# Altium PCB TDR3.PcbDoc
Units mm, origin at the board's own origin, x right, y up, seen from the top; angles counter-clockwise.
Board outline 49.02 x 57.02 mm, 6 copper layers (Top Layer, Int1 (GND), Int2 (GND), Int3 (PWR), Int4 (GND), Bottom Layer), stack 1.554 mm thick; 88 components, 47 nets, 274 pads, 188 vias.
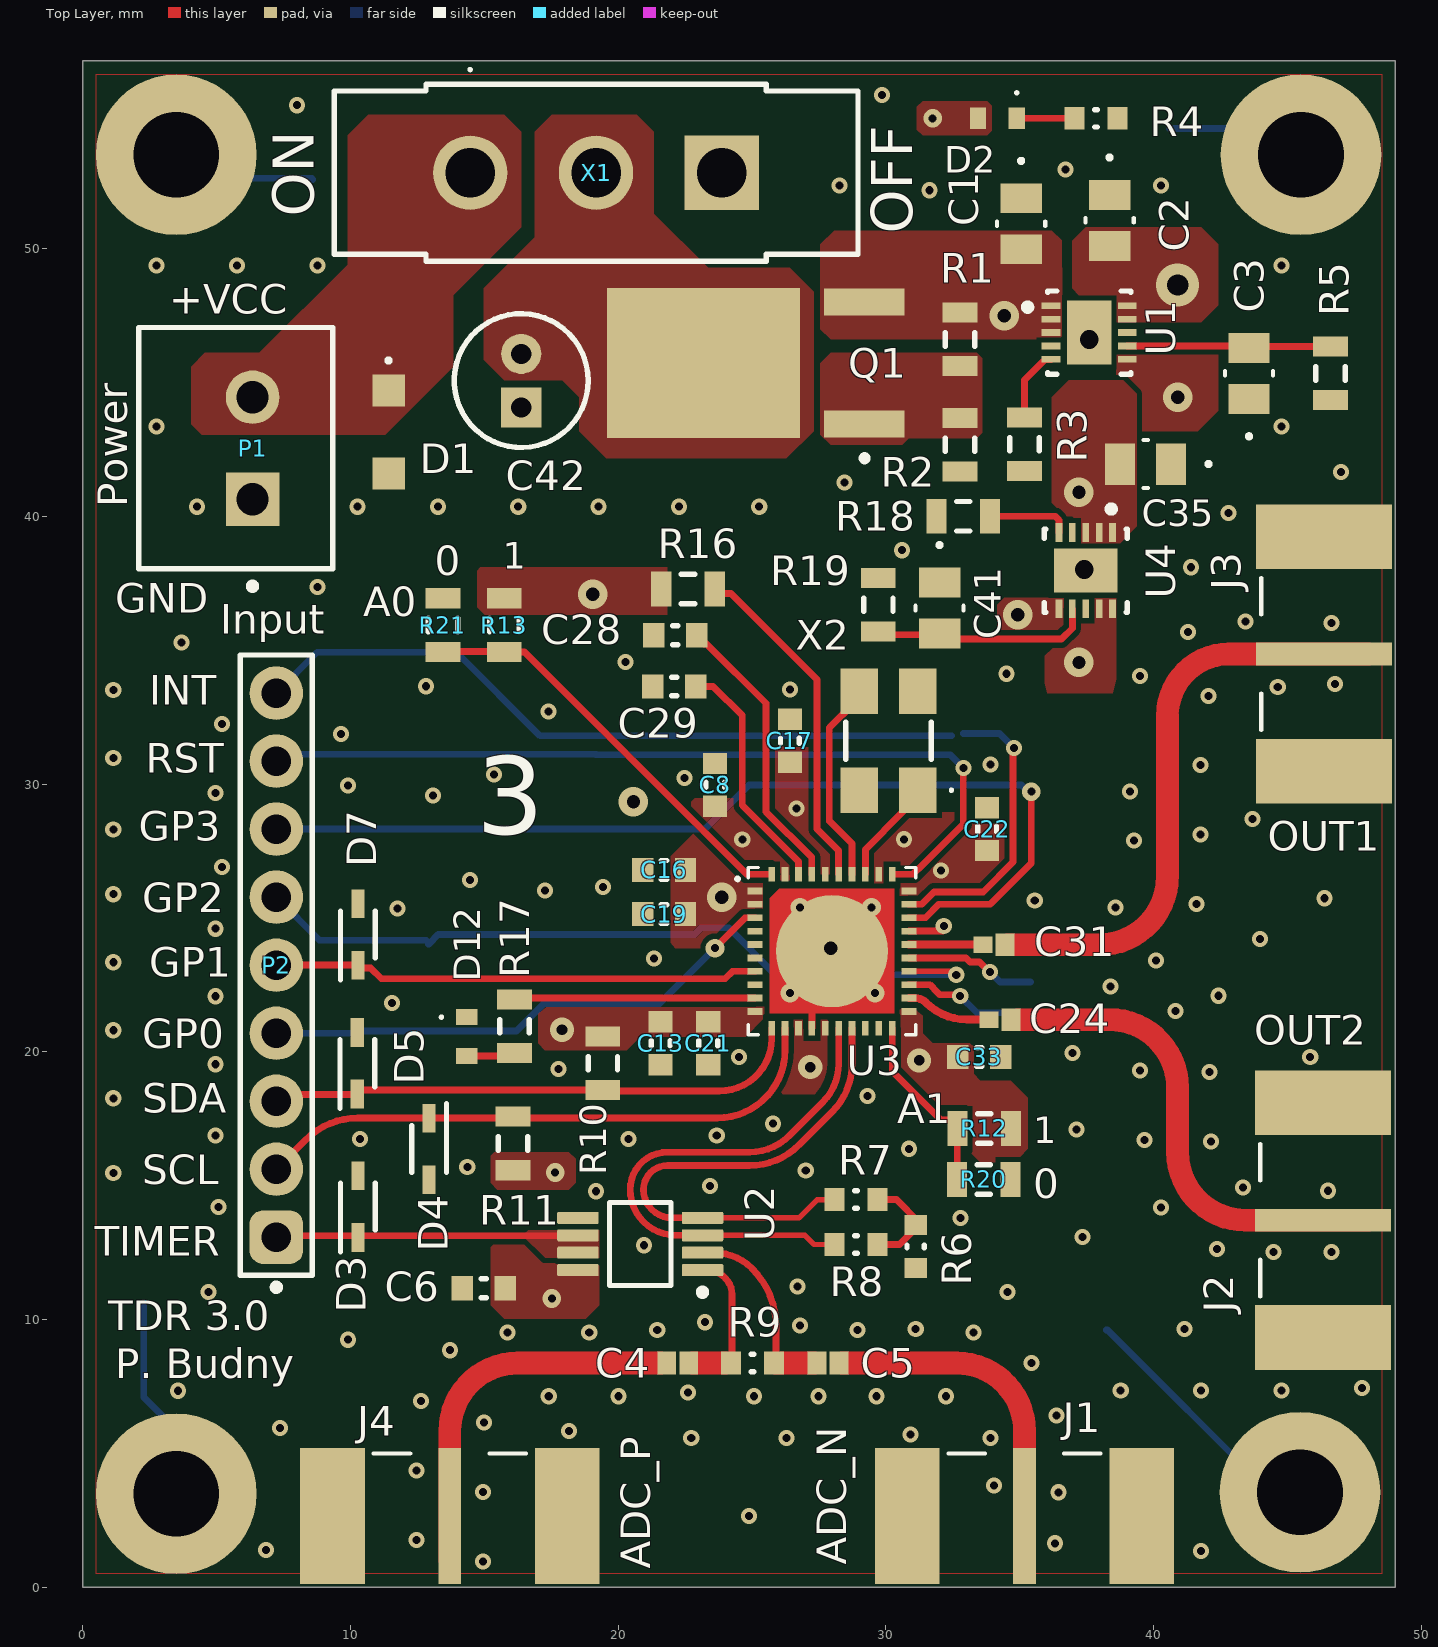
[diagram p0: Top Layer view]
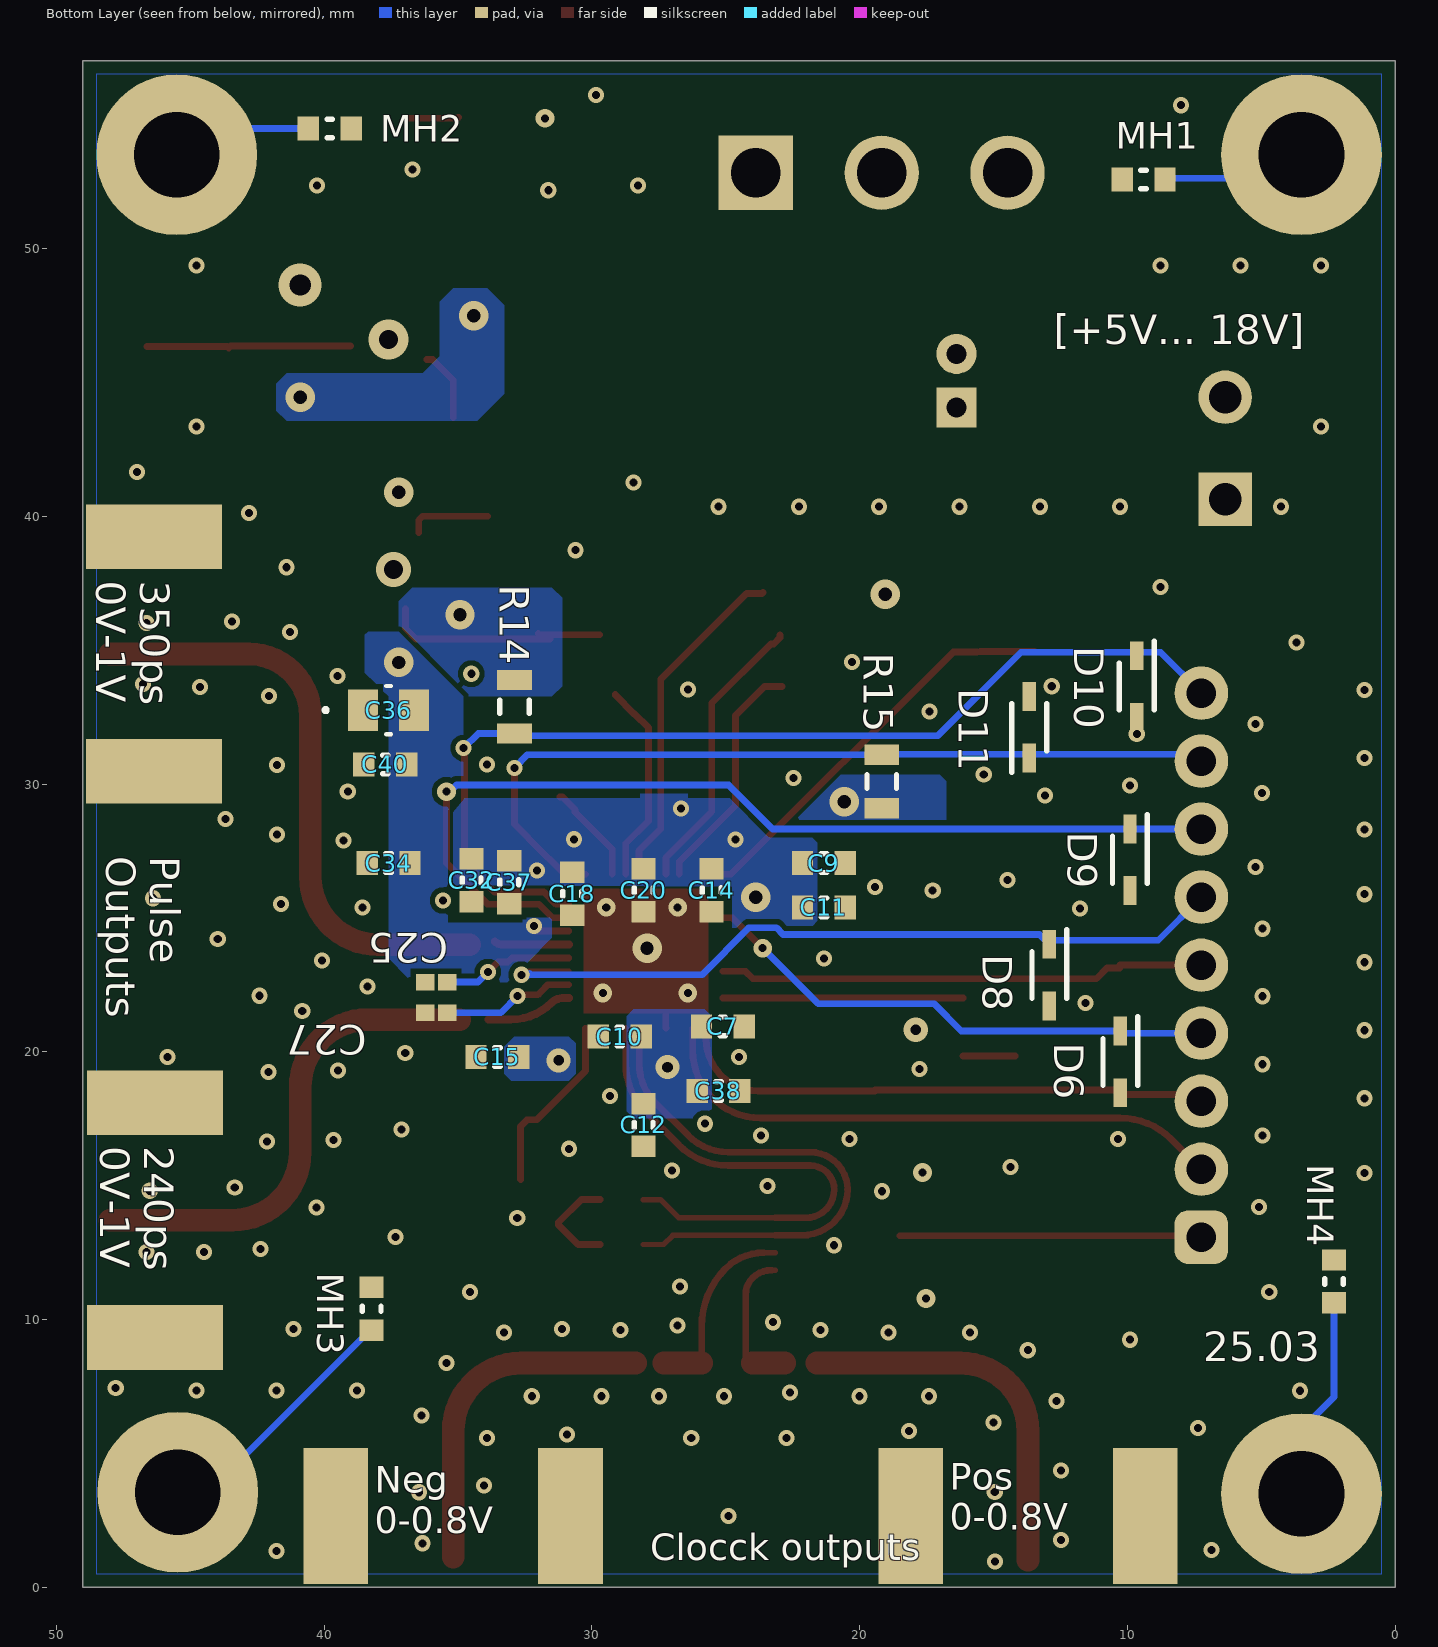
[diagram p1: Bottom Layer view, seen from below]
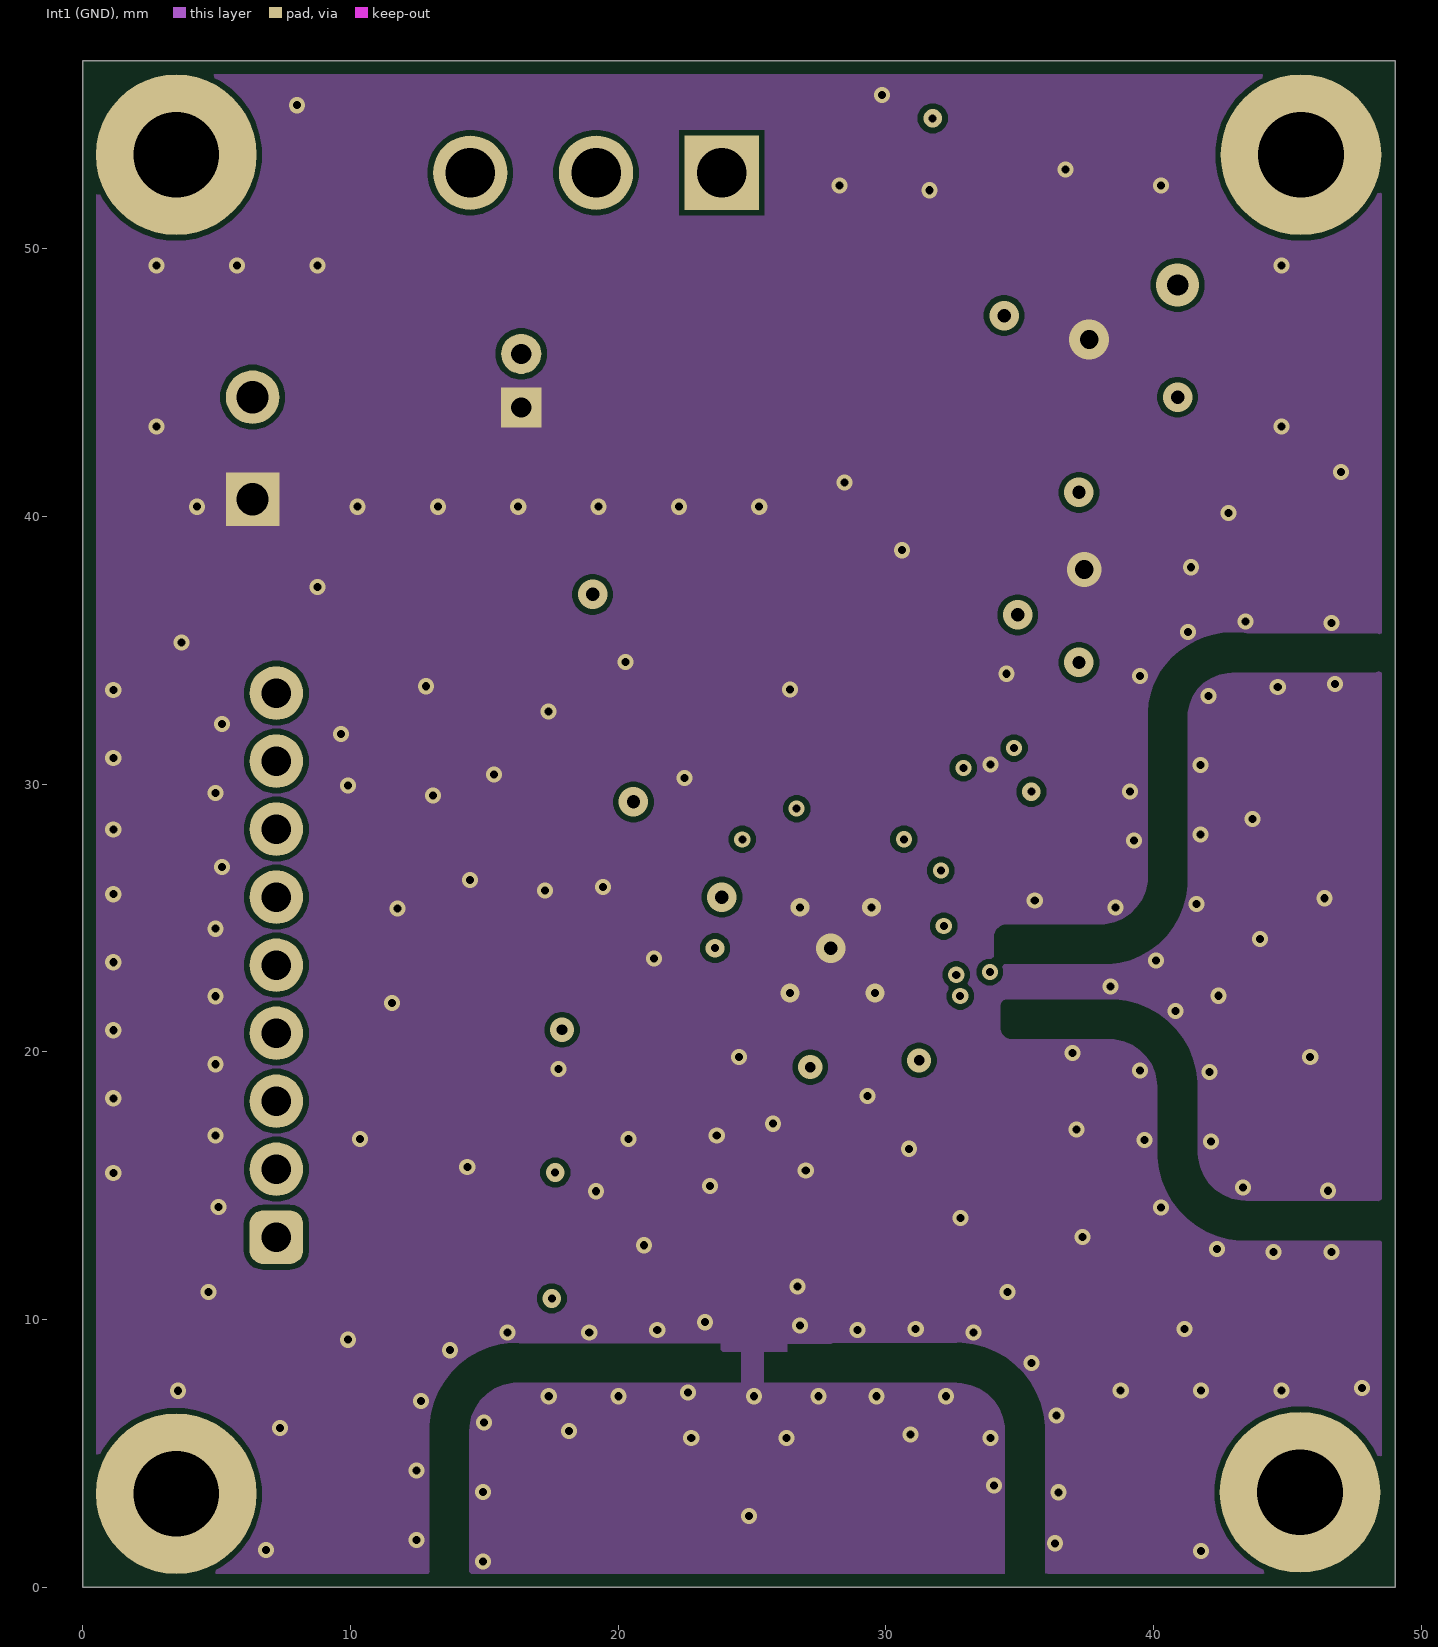
[diagram p2: Int1 (GND)]
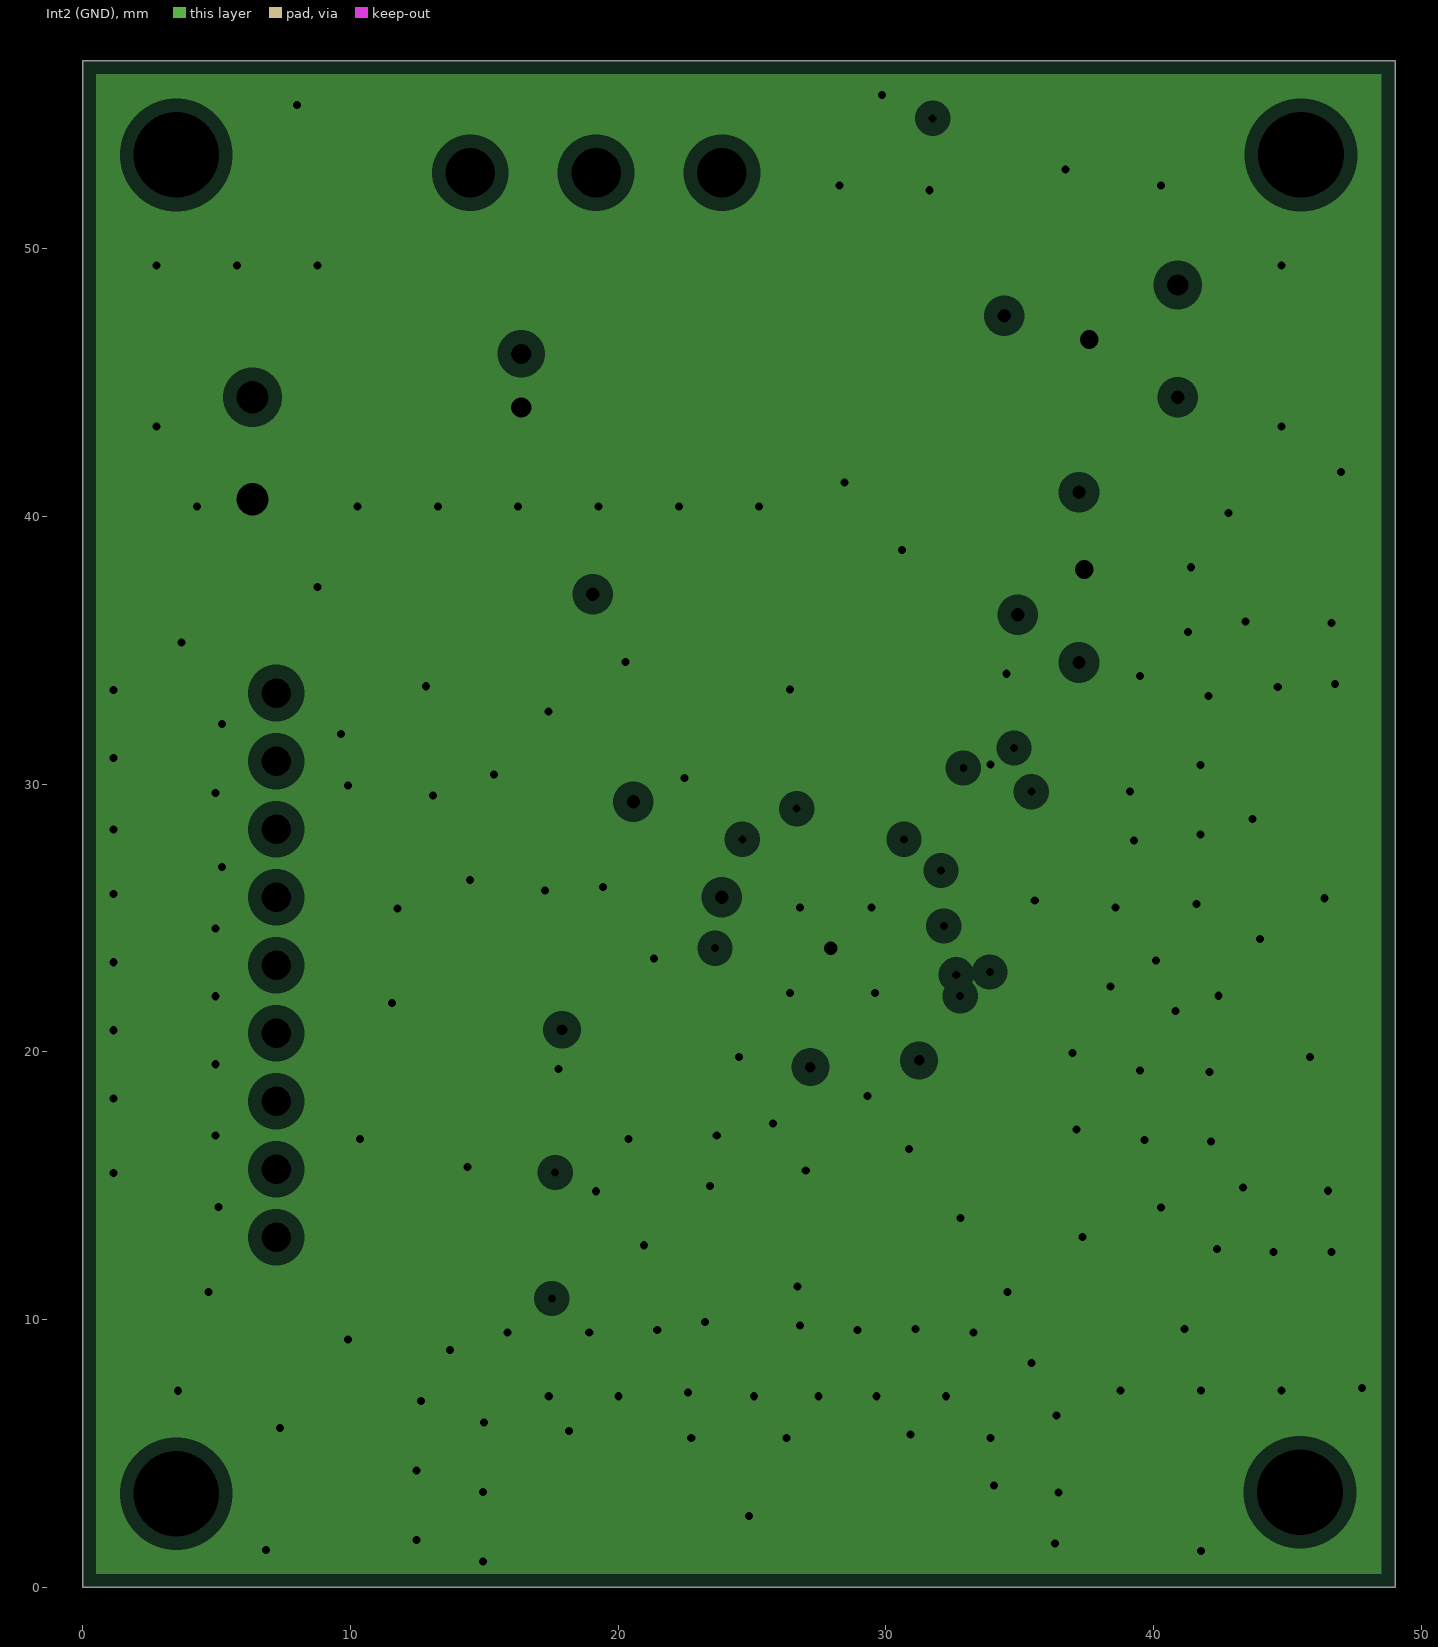
[diagram p3: Int2 (GND), clearances drawn from the general rule]
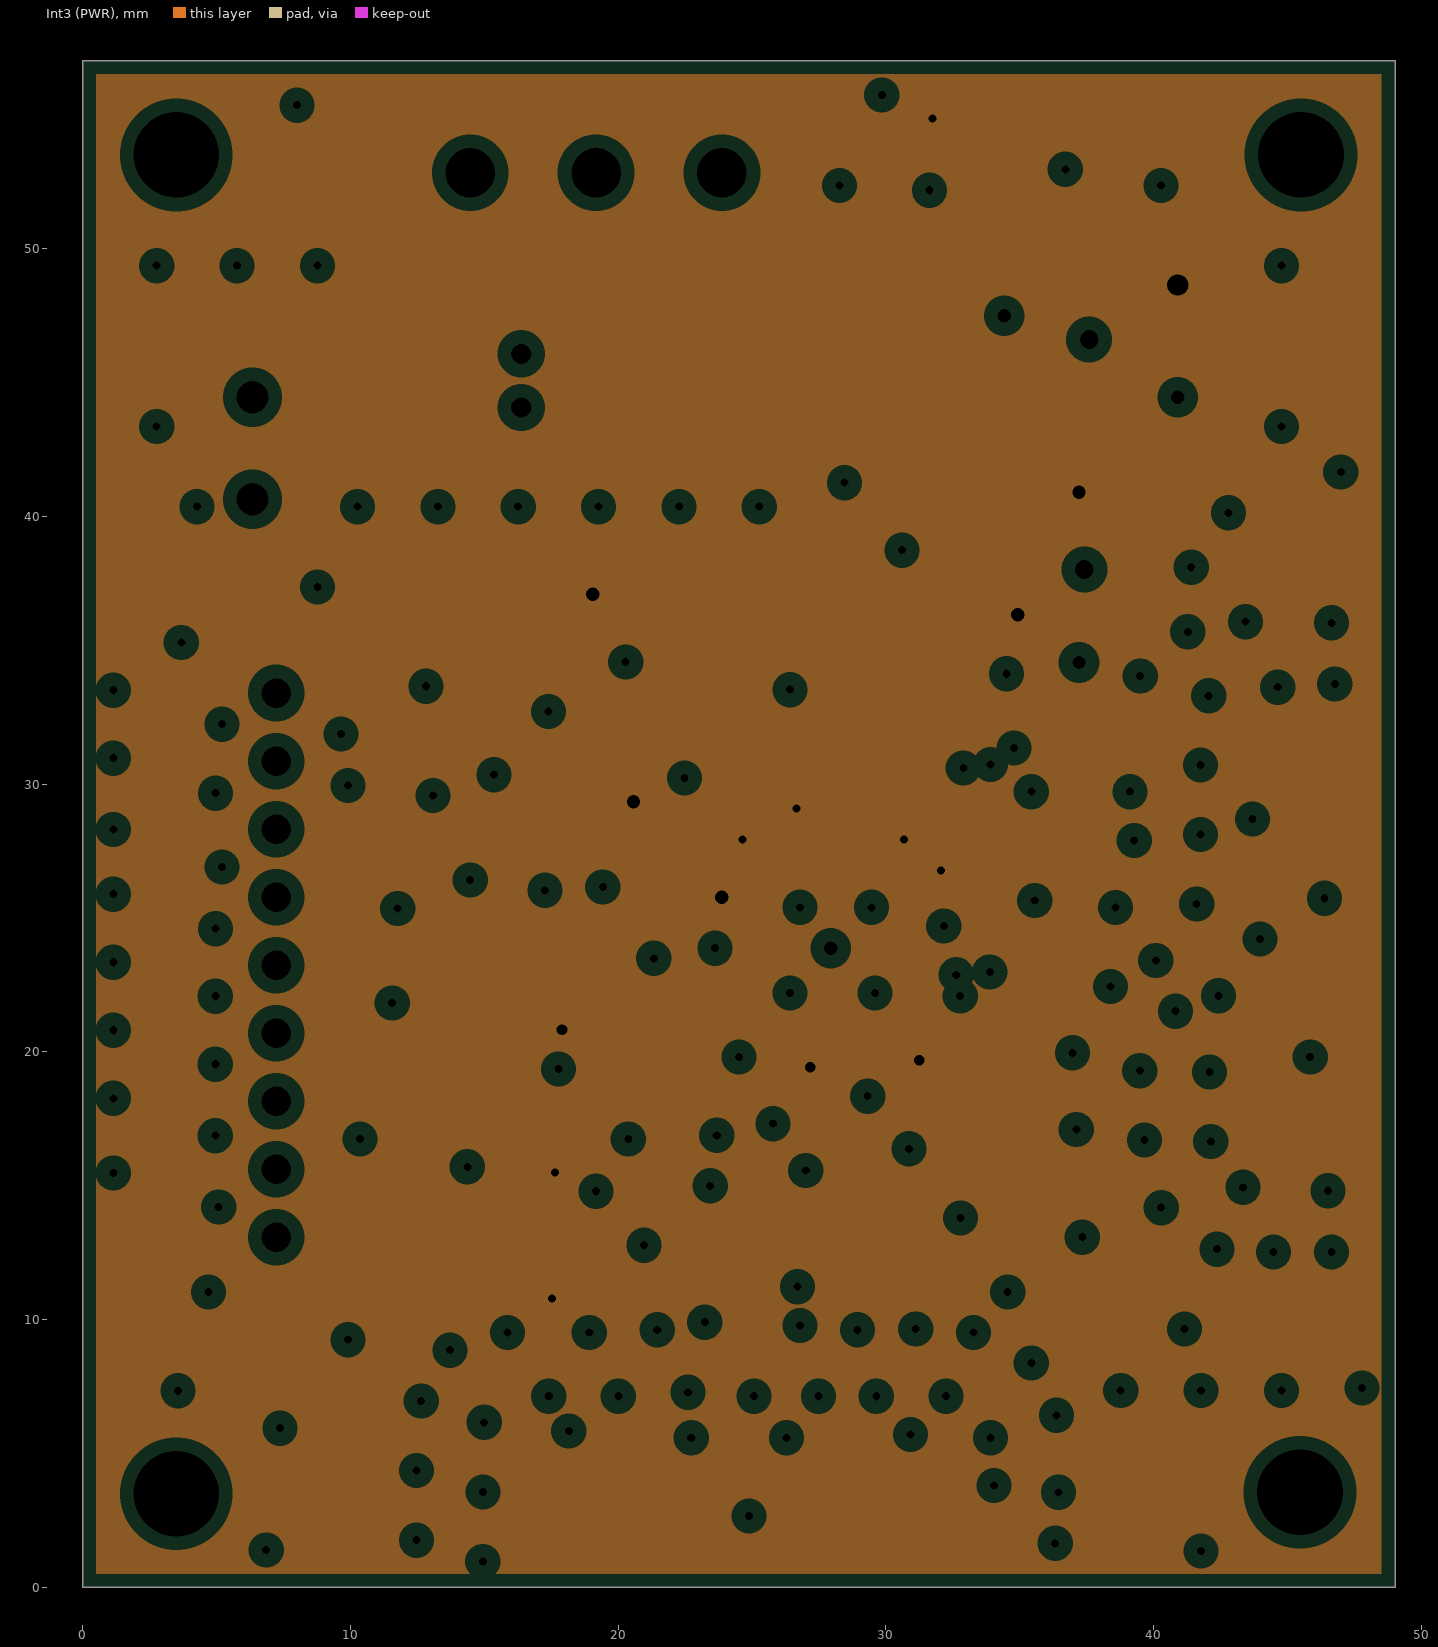
[diagram p4: Int3 (PWR), clearances drawn from the general rule]
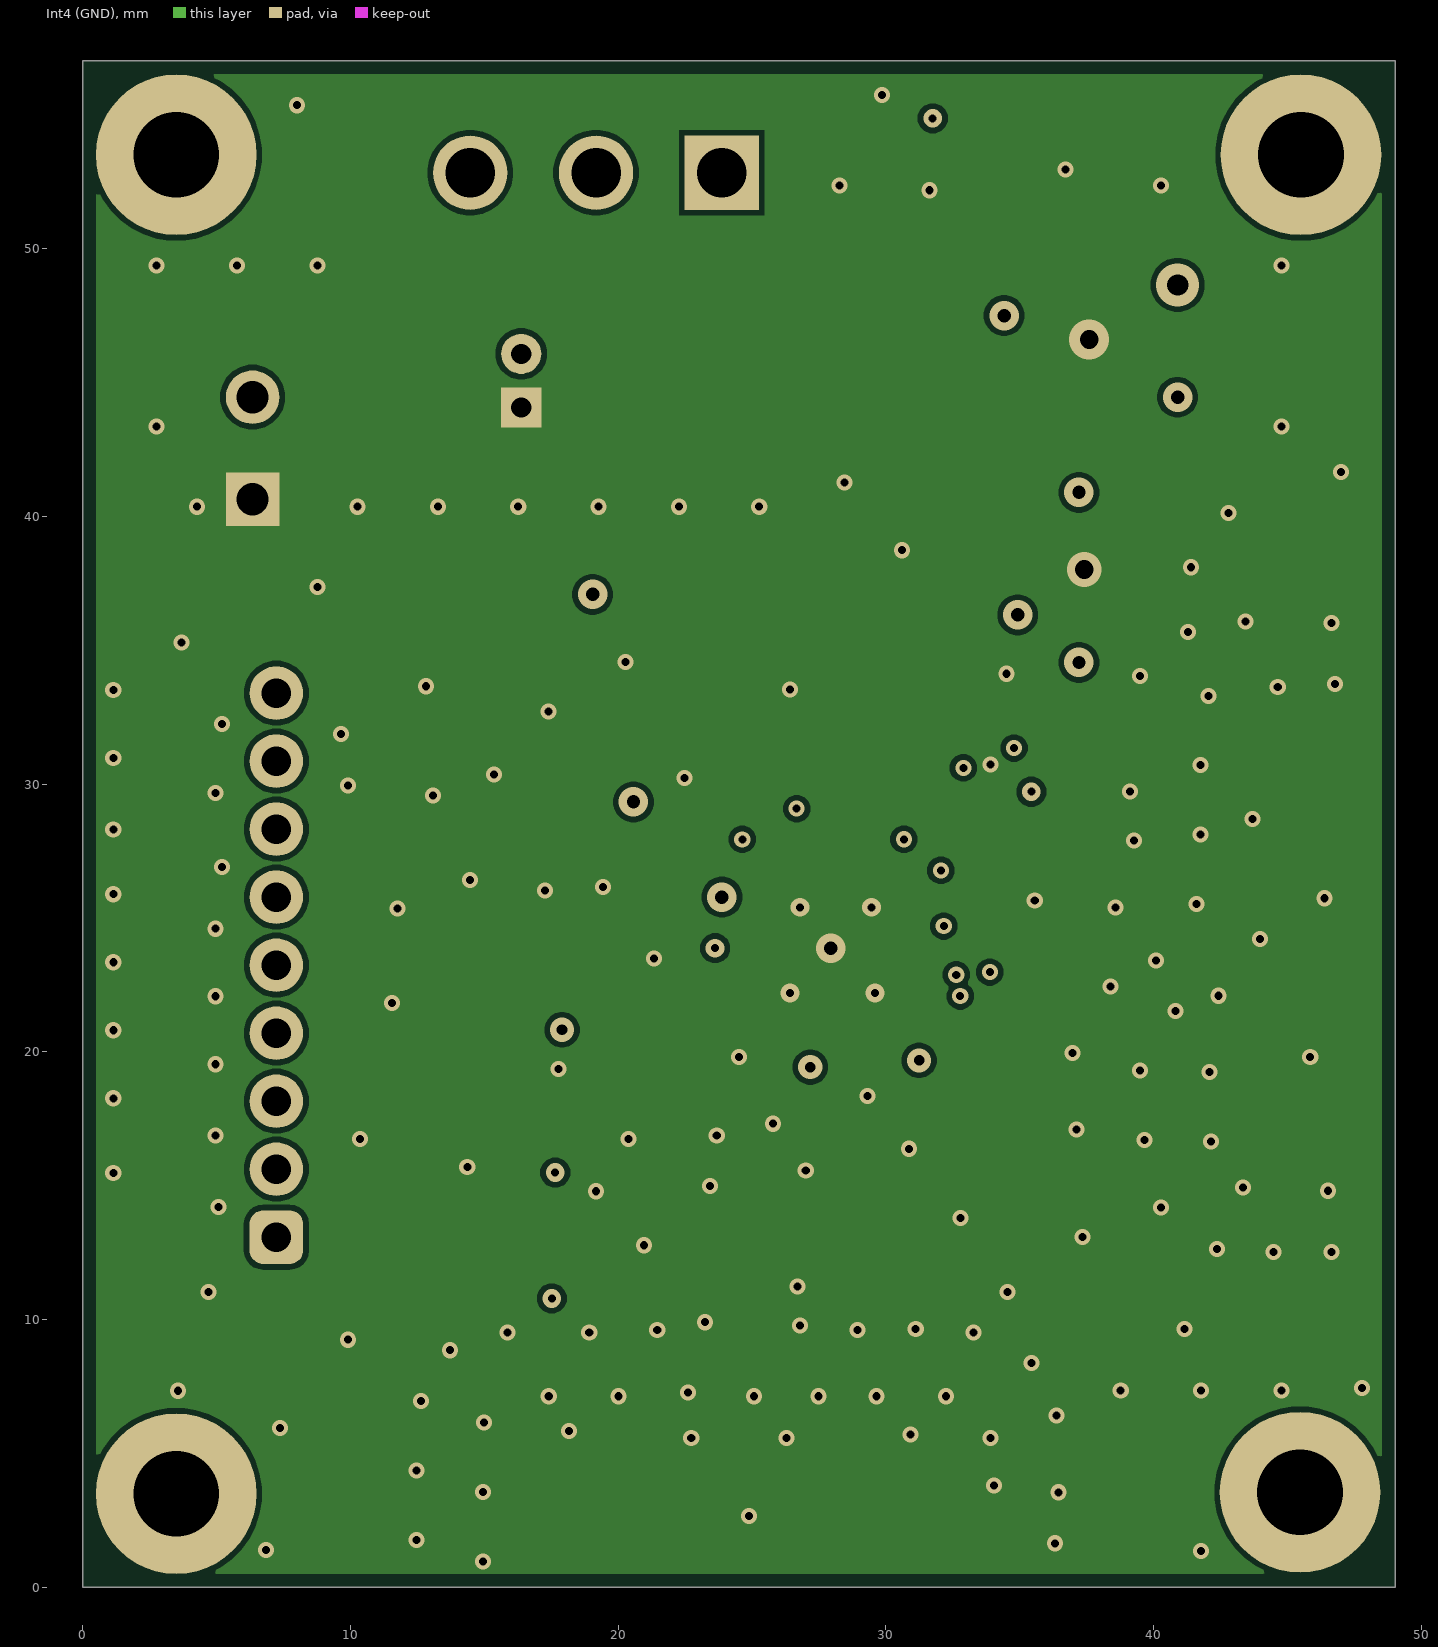
[diagram p5: Int4 (GND)]

## Layer stack, top to bottom
Top Solder: solder mask 0.0254, SM-001, Dk 4.85
Top Layer: signal copper 0.035
Dielectric 1: prepreg 0.2104, PP-006, Dk 4.4
Int1 (GND): signal copper 0.0152
Dielectric 3: core 0.4, Core-035, Dk 4.7
Int2 (GND): plane copper 0.0152, net GND
Dielectric 4: prepreg 0.1014, PP-006, Dk 4.4
Dielectric 5: prepreg 0.1014, PP-006, Dk 4.4
Int3 (PWR): plane copper 0.0152, net +3V3
Dielectric 6: core 0.4, Core-035, Dk 4.7
Int4 (GND): signal copper 0.0152
Dielectric 8: prepreg 0.2104, PP-006, Dk 4.4
Bottom Layer: signal copper 0.035
Bottom Solder: solder mask 0.0254, SM-001, Dk 4.85

## Board outline
0,0 0,57.023 49.022,57.023 49.022,0

## Design rules (kind name [scope] priority, off if disabled: settings)
Clearance Clearance_2 [InNetClass('Diff_Signal')] p1: gap=0.2 ignorepadtopadclearanceinfootprint=TRUE except(0.15: Arc-Arc Arc-Track Arc-SMDPad Track-Track Track-SMDPad; 0.3: Arc-Fill Arc-Poly Arc-Region Track-Fill Track-Poly Track-Region)
Clearance Clearance_1 [InNetClass('Signal')] p2: gap=0.203 ignorepadtopadclearanceinfootprint=TRUE except(0.15: Arc-Arc Arc-Track Arc-SMDPad Track-Track Track-SMDPad; 0.3: Arc-Fill Arc-Poly Arc-Region Track-Fill Track-Poly Track-Region)
Clearance [All] p3: gap=0.203 ignorepadtopadclearanceinfootprint=TRUE except(0.16: SMDPad-Text)
DiffPairsRouting [All] p1: maxlimit=0.25 minlimit=0.127 mostfreqgap=0.203 toplayer_mingap=0.25 toplayer_prefgap=0.25 toplayer_minwidth=0.185 toplayer_maxwidth=2.286 toplayer_prefwidth=0.25 midlayer1_maxgap=0.127 midlayer1_prefgap=0.127 midlayer1_minwidth=0.09 midlayer1_maxwidth=0.09 midlayer1_prefwidth=0.09 midlayer2_maxgap=0.127 midlayer2_prefgap=0.127 midlayer2_minwidth=0.09 midlayer2_maxwidth=0.09 midlayer2_prefwidth=0.09 bottomlayer_mingap=0.203 bottomlayer_maxgap=0.203 bottomlayer_minwidth=0.185 bottomlayer_maxwidth=0.185 bottomlayer_prefwidth=0.185 maxuncoupledlength=12.7
HoleSize [All] p1: absolutevalues=TRUE maxlimit=6.3 minlimit=0.15 maxpercent=80.000 minpercent=20.000
HoleToHoleClearance [All] p1: gap=0.2 allowstackedmicrovias=TRUE
Length [InNet('No Net')] p1: maxlimit=2540 minlimit=0
MatchedLengths [InNetClass('ADC line')] p1: tolerance=0.5 checknetsindiffpair=TRUE checkdiffpairvsdiffpair=FALSE checkxsignals=FALSE checkothers=FALSE
MinimumSolderMaskSliver [All] p1: minsoldermaskwidth=0.2
PlaneClearance [All] p1: clearance=0.508
PlaneConnect [All] p1: planeconnectstyle=Direct reliefexpansion=0.508 reliefentries=4 reliefconductorwidth=0.254 reliefairgap=0.254
PolygonConnect [All] p1: connectstyle=Direct reliefconductorwidth=0.254 reliefentries=4 polygonreliefangle="90 Angle" airgapwidth=0.254
RoutingCorners RoutingCorners_1 [InNetClass('Signal')] p1: cornerstyle=Round minsetback=2.54 maxsetback=2.54
RoutingCorners [All] p2: cornerstyle=45-Degree minsetback=2.54 maxsetback=2.54
RoutingVias [All] p1: holewidth=0.3 width=0.7 viastyle="Through Hole" minholewidth=0.15 minwidth=0.4 maxholewidth=6.3 maxwidth=13
SilkToSilkClearance [All] p1: silktosilkclearance=0.2
SilkToSolderMaskClearance [IsPad] p1: minsilkscreentomaskgap=0.2 clearancetoexposedcopper=TRUE
SolderMaskExpansion [All] p1: expansion=0.1 istentingtop=FALSE useseparateexpansions=TRUE expansionbottom=0.1 istentingbottom=FALSE soldermaskfromhole=TRUE
SupplyNets "Schematic Supply Nets_3" [InNet('VCO3')] p1: voltage=0.000
SupplyNets "Schematic Supply Nets_2" [InNet('+3V3')] p2: voltage=0.000
SupplyNets "Schematic Supply Nets" [InNet('GND')] p3: voltage=0.000
UnRoutedNet [All] p1: checkbadconnections=TRUE
Width Width_2 [InNetClass('Diff_Signal')] p1: maxlimit=0.9 minlimit=0.204 preferedwidth=0.254 toplayer_prefwidth=0.204 midlayer1_minwidth=0.254 midlayer1_maxwidth=0.254 midlayer2_minwidth=0.254 midlayer2_maxwidth=0.254 bottomlayer_minwidth=0.254 bottomlayer_maxwidth=0.254 minimp=50.000000 maximp=50.000000 favimp=50.000000
Width Width_1 [InNetClass('Signal')] p2: maxlimit=0.9 minlimit=0.254 preferedwidth=0.254 toplayer_minwidth=0.295 toplayer_prefwidth=0.295 midlayer1_maxwidth=0.254 midlayer2_maxwidth=0.254 bottomlayer_maxwidth=0.254 minimp=50.000000 maximp=50.000000 favimp=50.000000
Width [All] p3: maxlimit=1 minlimit=0.1 preferedwidth=0.254 toplayer_prefwidth=0.203 midlayer1_prefwidth=0.203 midlayer2_prefwidth=0.203 minimp=50.000000 maximp=50.000000 favimp=50.000000
20 further rules are at their usual default settings.

## Classes and differential pairs
net class Diff_Signal: 8T_CLK_N 8T_CLK_P ADC_CLK_N ADC_CLK_P NetC4_1 NetC5_1
net class Signal: 8T_OUT_1 NetC24_1 NetC31_1
net class GPIO[3..0]: GPIO0 GPIO1 GPIO2 GPIO3
component class MCU: 0.85mm C7 C8 C9 C10 C11 C12 C13 C14 C15 C16 C17 C18 C19 C20 C21 C22 C24 C25 C27 C28 C29 C31 C32 C33 C34 C37 C38 C40 D12 R10 R11 R12 R13 R14 R15 R16 R17 R20 R21 U3 X2
component class Poer/In&Out: C1 C2 C3 C4 C5 C6 C35 C36 C41 C42 D1 D2 D3 D4 D5 D6 D7 D8 D9 D10 D11 EEU-FR1 J1 J2 J3 J4 MH1 MH2 MH3 MH4 P1 P2 Q1 R1 R2 R3 R4 R5 R6 R7 R8 R9 R18 R19 U1 U2 U4 X1
differential pair ADC_CLK: +ADC_CLK_P -ADC_CLK_N
differential pair 8T_CLK: +8T_CLK_P -8T_CLK_N

## Components (designator, comment, footprint, x,y, rotation, side; value= is the part's Value field where it differs from the comment)
C1 "10uF" CAP_C0805X-HAC-DR_KEM 35.052,50.927 r270 top
C2 "10 uF" CAP_C0805X-HAC-DR_KEM 38.354,51.054 r270 top
C3 "DNM" CAP_C0805X-HAC-DR_KEM 43.561,45.339 r90 top
C4 "10pF" CAPC0402#1 22.225,8.382 r180 top
C5 "10pF" CAPC0402#1 27.842,8.382 r0 top
C6 "0.1uF" CAPC0603 14.986,11.176 r0 top
C7 "100pF" CAPC0603 25.108,20.955 r180 bottom
C8 "100pF" CAPC0603 23.622,29.972 r90 top
C9 "100pF" CAPC0603 21.336,27.051 r180 bottom
C10 "100pF" CAPC0603 28.956,20.574 r0 bottom
C11 "100pF" CAPC0603 21.336,25.397 r180 bottom
C12 "0.1uF" CAPC0603 28.067,17.272 r90 bottom
C13 "0.1uF" CAPC0603 21.59,20.32 r90 top
C14 "0.1uF" CAPC0603 25.527,26.035 r90 bottom
C15 "0.1uF" CAPC0603 33.528,19.812 r180 bottom
C16 "0.1uF" CAPC0603 21.717,26.8 r0 top
C17 "0.1uF" CAPC0603 26.416,31.623 r270 top
C18 "0.1uF" CAPC0603 30.734,25.908 r90 bottom
C19 "0.1uF" CAPC0603 21.717,25.146 r0 top
C20 "100pF" CAPC0603 28.067,26.035 r270 bottom
C21 "100pF" CAPC0603 23.368,20.32 r270 top
C22 "100pF" CAPC0603 33.782,28.321 r90 top
C24 "10pF" CAPC0402#2 34.266,21.206 r0 top
C25 "10pF" CAPC0402#3 35.814,22.606 r180 bottom
C27 "10pF" CAPC0402#3 35.814,21.463 r180 bottom
C28 "0.1uF" CAPC0603 22.136,35.56 r0 top
C29 "0.1uF" CAPC0603 22.099,33.648 r0 top
C31 "10pF" CAPC0402#2 34.036,24.003 r0 top
C32 "100pF" CAPC0603 34.49,26.407 r270 bottom
C33 "100pF" CAPC0603 33.49,19.812 r0 top
C34 "100pF" CAPC0603 37.592,27.051 r0 bottom
C35 "10uF" CAP_C0805X-HAC-DR_KEM 39.7,41.954 r180 top
C36 "10uF" CAP_C0805X-HAC-DR_KEM 37.592,32.766 r180 bottom
C37 "0.1uF" CAPC0603 33.085,26.341 r90 bottom
C38 "0.1uF" CAPC0603 25.273,18.542 r0 bottom
C40 "0.1uF" CAPC0603 37.719,30.734 r180 bottom
C41 "DNM" CAP_C0805X-HAC-DR_KEM 32.004,36.576 r270 top
C42 "100uF" "CAPPRD200W55D500H1250 - duplicate" 16.383,46.069 r270 top
D1 "SMF5.0A-T13" SODFL3618X110N 11.43,43.154 r270 top
D2 "TLMG1100-GS15" TLMG1100GS15 34.163,54.864 r270 top
D3 "AQ4020-01FTG" SOD2613X114N 10.287,14.224 r90 top
D4 "AQ4020-01FTG" SOD2613X114N 12.941,16.373 r270 top
D5 "AQ4020-01FTG" SOD2613X114N 10.263,19.58 r90 top
D6 "AQ4020-01FTG" SOD2613X114N 10.263,19.628 r270 bottom
D7 "AQ4020-01FTG" SOD2613X114N 10.287,24.384 r90 top
D8 "AQ4020-01FTG" SOD2613X114N 12.917,22.87 r270 bottom
D9 "AQ4020-01FTG" SOD2613X114N 9.906,27.178 r270 bottom
D10 "AQ4020-01FTG" SOD2613X114N 9.652,33.648 r270 bottom
D11 "AQ4020-01FTG" SOD2613X114N 13.669,32.127 r90 bottom
D12 "TLMG1100-GS15" TLMG1100GS15 14.351,20.574 r0 top
J1 "142-0701-851" CONN_142-0701-851_CIN 35.179,2.502 r180 top
J2 "142-0701-851" CONN_142-0701-851_CIN 46.482,13.716 r270 top
J3 "142-0701-851" CONN_142-0701-851_CIN 46.52,34.861 r270 top
J4 "142-0701-851" CONN_142-0701-851_CIN 13.716,2.502 r180 top
MH1 "DNM" CAPC0603 9.398,52.578 r180 bottom
MH2 "DNM" CAPC0603 39.789,54.483 r0 bottom
MH3 "DNM" CAPC0603 38.227,10.414 r270 bottom
MH4 "DNM" CAPC0603 2.286,11.43 r270 bottom
P1 "1803426" PHOE-1803426_V 6.35,42.545 r90 top
P2 "61300911121" 61300911121 7.239,23.241 r90 top
Q1 "DMP4015SK3-13" DMP4015SK3-13 25.145,45.726 r180 top
R1 "91k" RES0805 32.766,46.609 r90 top
R2 "10k" RES0805 32.766,42.672 r90 top
R3 "0" RES0805 35.179,42.688 r90 top
R4 "1.2K" RESC0603 37.846,54.864 r180 top
R5 "33.2K" RES0805 46.609,45.339 r90 top
R6 "50" RESC0603 31.115,12.738 r90 top
R7 "50" RESC0603 28.888,14.488 r180 top
R8 "50" RESC0603 28.888,12.808 r180 top
R9 "100" RESC0603 25.019,8.382 r0 top
R10 "10K" RES0805 19.431,19.574 r90 top
R11 "10K" RES0805 16.08,16.582 r270 top
R12 "DNM" RES0805 33.671,17.145 r0 top
R13 "DNM" RES0805 15.748,35.941 r90 top
R14 "10K" RES0805 32.893,32.893 r270 bottom
R15 "10K" RES0805 19.177,30.099 r90 bottom
R16 "10K" RES0805 22.611,37.287 r180 top
R17 "600" RES0805 16.129,20.955 r270 top
R18 "0" RES0805 32.893,40.005 r0 top
R19 "18.2K" RES0805 29.718,36.703 r270 top
R20 "DNM" RES0805 33.655,15.24 r180 top
R21 "DNM" RES0805 13.462,35.941 r270 top
U1 "LT3045EDD#PBF" FP-LT3045EDD#PBF-MFG 37.592,46.863 r0 top
U2 "SN65EPT22DGKR" DGK0008A_M 20.828,12.827 r180 top
U3 "8T49N241-998NLGI" NLG40P2_MFG 27.986,23.761 r0 top
U4 "LT3045EDD#PBF" FP-LT3045EDD#PBF-MFG 37.465,37.973 r270 top
X1 "5MS1S102AM2QE" 5MS1S102AM2QE 14.477,52.832 r270 top
X2 "H130B-25.000-18-F-1030-EXT-TR" H130B2500018F1030EXTTR 30.099,31.623 r270 top

## Footprints (in the part's own frame and the unit in brackets; to place one, negate y for a bottom-side part, rotate by r counter-clockwise, add the part's x,y. Pads: shape width x height; smd on the part's side, far side on the other; paste and mask are expansions set on the pad)
5MS1S102AM2QE [mm]
  round 2.775 hole 1.85 mask+0: 1(0,0) 2(0,4.7)
  rect 2.775x2.775 hole 1.85 mask+0: 3(0,9.4)
  silkscreen extent -3.9,-5.08 3.3,14.48, body extent -3.3,-1.65 3.3,11.05, height 12.08
61300911121 [mm] "Pin Header, pitch 2.54 mm, THT, Vertical, single row, 9p"
  rrect50% 2x2 hole 1.1 mask+0: 1(-10.16,0)
  round 2 hole 1.1 mask+0: 2(-7.62,0) 3(-5.08,0) 4(-2.54,0) 5(0,0) 6(2.54,0) 7(5.08,0) 8(7.62,0) 9(10.16,0)
  silkscreen extent -12.15,-1.35 11.58,1.35, body extent -11.43,-1.27 11.43,1.27, height 8.57
CAP_C0805X-HAC-DR_KEM [mil]
  rect 44x61 smd paste+0 mask+0: 1(-37.5,0) 2(37.5,0)
  silkscreen extent -95,-36 3,36, body extent -46,-31 46,31, height 39
CAPC0402#1 [mm] "Chip Capacitor, 2-Leads, Body 1,00x0,50mm, IPC Medium Density"
  rect 0.7x0.85 smd: 1(-0.41,0) 2(0.41,0)
  body extent -0.53,-0.28 0.53,0.27, height 0.6
CAPC0402#2 [mm] "Chip Capacitor, 2-Leads, Body 1,00x0,50mm, IPC Medium Density"
  rect 0.7x0.62 smd: 1(-0.41,0)
  rect 0.7x0.85 smd: 2(0.41,0)
  body extent -0.53,-0.28 0.53,0.27, height 0.6
CAPC0402#3 [mm] "Chip Capacitor, 2-Leads, Body 1,00x0,50mm, IPC Medium Density"
  rect 0.7x0.62 smd: 1(-0.41,0) 2(0.41,0)
  body extent -0.53,-0.28 0.53,0.27, height 0.6
CAPC0603 [mm] "Chip Capacitor, 2-Leads, Body 1,60x0,80mm, IPC Medium Density"
  rect 0.8x0.9 smd: 1(-0.8,0) 2(0.8,0)
  silkscreen extent -0.1,-0.35 0.1,0.35, body extent -0.83,-0.43 0.82,0.42, height 0.5
"CAPPRD200W55D500H1250 - duplicate" [mm]
  round 1.5 hole 0.75 mask+0: 1(0,0)
  rect 1.5x1.5 hole 0.75 mask+0: 2(2,0)
  silkscreen extent -1.5,-2.5 3.5,2.5, body extent -1.81,-2.67 3.68,2.83, height 19.5
CONN_142-0701-851_CIN [mil]
  rect 33.46x200 smd paste+0 mask+0: 1(0,-6.5)
  rect 95x200 smd paste+0 mask+0: 2(-172.5,-6.5) 3(172.5,-6.5)
  rect 95x200 smd far side paste+0 mask+0: 2(-172.5,-6.5) 2(172.5,-6.5)
  round 60 smd paste-100 mask-100: 4(-172.5,-6.5) 5(172.5,-6.5)
  silkscreen extent -112,-99 112,-98, body extent -188,-100 188,462, height 156
DGK0008A_M [mm] "TSOP, 8-Leads, Body 3.1x3.1mm, Pitch 0.65mm, IPC Low Density"
  rrect22% 1.55x0.45 smd: 1(-2.325,0.975) 2(-2.325,0.325) 3(-2.325,-0.325) 4(-2.325,-0.975) 5(2.325,-0.975) 6(2.325,-0.325) 7(2.325,0.325) 8(2.325,0.975)
  silkscreen extent -2.45,-1.55 1.15,1.92, body extent -2.45,-1.5 2.45,1.5, height 0.94
DMP4015SK3-13 [mm] "D-PAK, 3-Pads, Body 6,20x6,41mm (max), IPC Medium Density"
  rect 3x1 smd: 1(-4.05,2.28) 3(-4.05,-2.28)
  rect 7.2x5.6 smd: 4(1.95,0)
  silkscreen extent -4.16,3.46 -3.96,3.66, body extent -2.35,-3.05 3.85,3.05, height 2.29
FP-LT3045EDD#PBF-MFG [mm]
  rect 0.7x0.25 smd paste+0 mask+0: 1(-1.425,1) 2(-1.425,0.5) 3(-1.425,0) 4(-1.425,-0.5) 5(-1.425,-1) 6(1.425,-1) 7(1.425,-0.5) 8(1.425,0) 9(1.425,0.5) 10(1.425,1)
  rect 1.65x2.38 smd paste+0 mask+0: 11(0,0)
  silkscreen extent -2.42,-1.55 1.55,1.55, body extent -1.88,-1.65 1.88,1.65, height 0.25
H130B2500018F1030EXTTR [mm]
  rect 1.7x1.4 smd: 1(1.85,1.1) 2(-1.85,1.1) 3(-1.85,-1.1) 4(1.85,-1.1)
  silkscreen extent -0.7,-1.6 1.9,2.4, body extent -2.56,-1.66 2.56,1.66, height 1
NLG40P2_MFG [mm] "Recommended Land Pattern"
  rect 0.55x0.25 smd paste+0 mask+0: 1(-2.875,2.25) 2(-2.875,1.75) 3(-2.875,1.25) 4(-2.875,0.75) 5(-2.875,0.25) 6(-2.875,-0.25) 7(-2.875,-0.75) 8(-2.875,-1.25) 9(-2.875,-1.75) 10(-2.875,-2.25) 21(2.875,-2.25) 22(2.875,-1.75) 23(2.875,-1.25) 24(2.875,-0.75) 25(2.875,-0.25) 26(2.875,0.25) 27(2.875,0.75) 28(2.875,1.25) 29(2.875,1.75) 30(2.875,2.25)
  rect 0.25x0.55 smd paste+0 mask+0: 11(-2.25,-2.875) 12(-1.75,-2.875) 13(-1.25,-2.875) 14(-0.75,-2.875) 15(-0.25,-2.875) 16(0.25,-2.875) 17(0.75,-2.875) 18(1.25,-2.875) 19(1.75,-2.875) 20(2.25,-2.875) 31(2.25,2.875) 32(1.75,2.875) 33(1.25,2.875) 34(0.75,2.875) 35(0.25,2.875) 36(-0.25,2.875) 37(-0.75,2.875) 38(-1.25,2.875) 39(-1.75,2.875) 40(-2.25,2.875)
  round 4.185 smd paste+0 mask+0: 41(0,0)
  Top Layer region: -1.975,2.325 2.325,2.325 2.325,-2.325 -2.325,-2.325 -2.325,1.975
  silkscreen extent -3.59,-3.13 3.13,3.13, body extent -3,-3 3,3, height 1
PHOE-1803426_V [mm] "THD, 2-Leads, Body 9.01x7.25mm, Pitch 3.81mm"
  rect 2x2 hole 1.2 mask+0: 1(-1.905,0)
  round 2 hole 1.2 mask+0: 2(1.905,0)
  silkscreen extent -5.28,-3 4.5,4.25, body extent -4.5,-3 4.51,4.25, height 9.2
RES0805 [mm] "Chip Resistor, 2-Leads, Body 2,00x1,23mm, IPC Medium Density"
  rect 0.75x1.3 smd: 1(-1,0) 2(1,0)
  silkscreen extent -0.25,-0.55 0.25,0.55, body extent -1.03,-0.63 1.02,0.63, height 0.6
RESC0603 [mm] "Chip Resistor, 2-Leads, Body 1,60x0,80mm, IPC Medium Density"
  rect 0.75x0.85 smd: 1(-0.8,0) 2(0.8,0)
  silkscreen extent -0.05,-0.33 0.05,0.33, body extent -0.83,-0.43 0.82,0.43, height 0.5
SOD2613X114N [mm]
  rect 1.075x0.5 smd: 1(-1.15,0) 2(1.15,0)
  silkscreen extent -1.69,-0.65 0.87,0.65, body extent -1.3,-0.65 1.3,0.65, height 1.14
SODFL3618X110N [mm]
  rect 1.2x1.22 smd: 1(-1.55,0) 2(1.55,0)
  silkscreen extent -2.74,-0.08 -2.59,0.08, body extent -1.83,-0.87 1.83,0.87, height 1.1
TLMG1100GS15 [mm]
  rect 0.8x0.6 smd: 1(0,0.725) 2(0,-0.725)
  silkscreen extent -1,0.68 -0.9,0.77, body extent -0.4,-0.8 0.4,0.8, height 0.75

## Part data
C1 C2 C3 C35 C36 C41: library part C0805X399C8HAC7800, "No Description Available", Manufacturer_Name=Kemet, Copyright="Copyright (C) 2025 Ultra Librarian. All rights reserved.", Manufacturer_Part_Number=C0805X399C8HAC7800
C4 C5 C7 C8 C9 C10 C11 C20 C21 C22 C24 C25 C27 C31 C32 C33 C34: library part C0603, "No Description Available", Manufacturer_Name=Kemet, Manufacturer_Part_Number=C0805X399C8HAC7800, Copyright="Copyright (C) 2025 Ultra Librarian. All rights reserved."
C6 C12 C13 C14 C15 C16 C17 C18 C19 C29 C37 C38 C40 MH1 MH2 MH3 MH4: library part C0603, "CAP SMD 0805", Manufacturer_Name=Kemet, Manufacturer_Part_Number=C0805X399C8HAC7800, Copyright="Copyright (C) 2025 Ultra Librarian. All rights reserved."
C28: library part C0603, "CAP SMD 0603", Manufacturer_Name=Kemet, Manufacturer_Part_Number=C0805X399C8HAC7800, Copyright="Copyright (C) 2025 Ultra Librarian. All rights reserved."
C42: library part "100uF electrolitic"
D1: "TVS Diode (Uni-directional)", Manufacturer_Name=LITTELFUSE, Mouser Part Number=576-SMF5.0A-T13, Arrow Part Number=SMF5.0A-T13, Arrow Price/Stock=https://www.arrow.com/en/products/smf5.0a-t13/littelfuse?utm_currency=USD&region=nac, Datasheet Link=https://www.littelfuse.com/~/media/electronics/datasheets/tvs_diodes/littelfuse_tvs_diode_smf_datasheet.pdf.pdf, Height=1.1mm, Manufacturer_Part_Number=SMF5.0A-T13, Mouser Price/Stock=https://www.mouser.co.uk/ProductDetail/Littelfuse/SMF5.0A-T13?qs=aGgfWYEhH7lEohru0mAWAg%3D%3D
D2 D12: "Standard LEDs - SMD CHIPLED(SMD 0603-LED) GREEN U.BRIGHT-E4", Manufacturer_Name=Vishay, Mouser Part Number=78-TLMG1100-GS15, Datasheet Link=https://www.vishay.com/docs/83173/tlmx1100.pdf, Geometry.Height=0.65mm, Manufacturer_Part_Number=TLMG1100-GS15, Mouser Price/Stock=https://www.mouser.co.uk/ProductDetail/Vishay-Semiconductors/TLMG1100-GS15?qs=vvQtp7zwQdObPNLeC1kn7g%3D%3D
D3 D4 D5 D6 D7 D8 D9 D10 D11: "TVS Diode (Uni-directional)", Manufacturer_Name=LITTELFUSE, Mouser Part Number=576-AQ4020-01FTG, Arrow Part Number=AQ4020-01FTG, Arrow Price/Stock=https://www.arrow.com/en/products/aq4020-01ftg/littelfuse?utm_currency=USD&region=nac, Datasheet Link=https://componentsearchengine.com/Datasheets/2/AQ4020-01FTG.pdf, Height=1.14mm, Manufacturer_Part_Number=AQ4020-01FTG, Mouser Price/Stock=https://www.mouser.co.uk/ProductDetail/Littelfuse/AQ4020-01FTG?qs=YCa%2FAAYMW015W3B84qpvIw%3D%3D
J1 J2 J3 J4: "Description", Manufacturer_Name="Cinch Connectivity Solutions", Copyright="Copyright (C) 2025 Ultra Librarian. All rights reserved.", Manufacturer_Part_Number=142-0701-851, RefDes=RefDes, Type=Type
P1: library part CMP-2000-05826-1, "Male Header, Pitch 3.81 mm, 1 x 2 Position, Height 9.2 mm, Tail Length 3.4 mm", Manufacturer="Phoenix Contact", Package Description="Male Header, Pitch 3.81 mm, 1 x 2 Position, Height 9.2 mm", Datasheet URL=https://www.phoenixcontact.com/online/portal/cn/pxc/product_detail_page/!ut/p/b1/3VfHjrNIGHyWeQDG5HAkm5zjxQIM2AQDNvnp1zNa7WFX889l5YPpA6L1qUtVdFX3d4gPEYCiFAaBJHgID_Etma9lMl67W9J8fcf4iRJ1HIRRHAIZDANpTKVtR3IFAyUOwSEE0ZNTbb2iOquuOqg8OKsEReRD0XpT8cAJtHK1h62gd5Lwwj7fSR7gfNZiWNE2tu2Xg71pvaHw3VHbDIccysUbixteZxggMWJnxWgP9KIolKko13HrKNI0OD69xjcsLwZb9oJmcNi4flh1xw9LW6-eWTQ9nREGMg82nQ7i5d6Jdk07dw7fZbrokLagaoyYggEvB4C7H5W4HERjSAam7I1pSvC1iqzSu8itk8CidtE6n3bP2nD0Pp6iRD-LQiLob5pFzwLixwIWO7iH0PcgleukhedgldkYbrFLA5WSM7ufG5_qGPkUc9vEzZQaS901mlWkPYn5tWxhabkCUfW4SsSIbpPuMIJHpQReslhERyEnqVrZBIU1V5Nilrs5X123FVtC3BVOSLHMP1b6PfXsNSgk1T-F50SEmtzqQUXqhsW5rwQ1o0BXB2gELrcQ4gCUoNAFTBX6N2LEmxJz0Hclhr8rsXf1mPOuHoPf1WPwu3oMflePSW-7Fd81PGj4i1jqc2r6kGnO3K4b7QxsE14hAduG8C7FaT2GvZ7I-s0j05SGAI1kaO9y99Mt55acg9cLDNYaWwQcdDTPAtjrfMY1OBkOcVEr9HZ8tGspIQLbIVDtpjctgzHFMG4BAZsGvQthBBH4WA-nFo17BJ08nhvnnSIvtClxxDZLZLDt43EXgXAD-FUl6xp1LReX8w3Sb-3dEFiLergsTPmiPWlKHKTnUE9MvjMWis8MoKAxhXcLRQoyR1OjaJFnuS2q9AQSlWi71_PQS1I7hwNcTAR9vGjIY_k4yIf4mrafS9Z-gp_9mn329-4, Datasheet Version=02/2015, Manufacturer URL=http://www.phoenixcontact.com/, Mounting Technology=ThroughHole, Package Reference=1803426
P2: library part CMP-1502-01080-4, "THT Vertical Pin Header WR-PHD, Pitch 2.54 mm, Single Row, 9 pins", Color=Black, Contact Resistance=20mΩ, Current Rating=3A, Operating Supply Voltage=250V, Connector Type="Male Pin", Contact Material=Copper, Contact Mating Length=5.9944mm, Contact Plating=Gold, Gender=Male, Lead Pitch=2.54mm, Mount="Through Hole", Number of Contacts=9, Number of Pins=9, Number of Positions=9, Number of Rows=1, Orientation=Vertical, Packaging=Bulk, Pitch=2.54mm, RoHS=Compliant, Termination=Solder
R1 R2 R3 R5 R10 R11 R12 R13 R14 R15 R16 R17 R18 R19 R20 R21: library part R0805, "RES SMD 0805", Package=None, Availability=Unavailable, MP=RT0805FRE075K36L, Price=None
R4 R6 R7 R8 R9: library part R0603, "RES SMD 0603", Package=None, Availability=Unavailable, MP=RT0805FRE075K36L, Price=None
U1 U4: library part CMP-09138-000240-1, "IC REG LINEAR 0V 500MA 10DFN", Case/Package=DFN, Dropout Voltage=260mV, Max Operating Temperature=125°C, Min Current Limit=570mA, Min Operating Temperature=-40°C, Output Current=500mA, Output Voltage=15V, Number of Regulators=1, RoHS Compliant=Yes, Series=-
U2: library part CMP-0327-00215-3, "4000 Mbps 3.3 V Dual LVTTL / LVCMOS to Differential LVPECL Buffer, 2 Tx and 2 Rx, -40 to +85 degC, 8-pin VSSOP (DGK), Green (RoHS & no Sb/Br)", Manufacturer="Texas Instruments", ComponentLink1Description="Manufacturer URL", ComponentLink1URL=http://www.ti.com/, ComponentLink2Description=Datasheet, ComponentLink2URL=http://www.ti.com/general/docs/lit/getliterature.tsp?genericPartNumber=SN65EPT22&fileType=pdf, ComponentLink3Description="URL Link1", ComponentLink3URL=SamplesURL:http://www.ti.com/product/sn65ept22#samples, DatasheetVersion=SLLS926A, Eco-Plan="Green (RoHS & no Sb/Br)", ICC(Max)(mA)=50, Input Signal="LVTTL, CMOS", Mounting Technology="Surface Mount", No. of Rx=2, No. of Tx=2, Output Signal=LVPECL, PackageDescription="8-Pin Thin Small Outline Package 3 x 3 mm Body ,0.65 mm Pitch", PackageReference=DGK0008A, PackageVersion="revE, May-2006", PartNumber=SN65EPT22DGKR, Signaling Rate(Mbps)=4000, SubFamily="PECL PHY", xECL=TRUE
U3: library part 8T49N241-999NLGI, "Tin Active e3 CLOCK GENERATOR OTHER (Type) IC 18Weeks -40C 6mm 1GHz", Manufacturer Lifecycle Status=ACTIVE, Max Frequency=1GHz, Max Input Voltage=3.465V, Max Operating Temperature=85°C, Min Input Voltage=1.71V, Min Operating Temperature=-40°C, Package Quantity=0, ComponentLink1Description="Manufacturer's Website", ComponentLink1URL=http://www.renesas.com, ComponentLink2Description="Datasheet URL", ComponentLink2URL=https://octopart.com/cad-content/api/get-model-datasheet/15189/106937583, ComponentLink3Description="Manufacturer's Package Drawing", ComponentLink3URL=https://www.renesas.com/en/document/psc/package-outline-drawing-package-code-nlg40p2-40-vfqfp-n-60-x-60-x-090-mm-body-05mm-pitch, Contact Plating=Tin, Export Control Classification Number (ECCN) Code=NLR, Harmonized Tariff Schedule (HTS) Code=8540000000, Height=900µm, HelpURL=https://octopart.com/cad-content/api/get-model-datasheet/15189/106937583, Input=Crystal, Interface=I2C, Lead Free="Lead Free", Length=6mm, Lifecycle Status=Production, Max Output Frequency=1GHz, Mount="Surface Mount", MSL=3, Number of Circuits=1, Number of Pins=40, Output Type="HCSL, LVCMOS, LVDS, LVPECL", Part Family=8T49N241, Phase Jitter=350fs, Pitch=500µm, RoHS=Compliant, Thickness=900µm, Width=6mm
X1: "Switch: Slide; Positions: 2; SPDT; 2A/250VAC; 5A/28VDC; ON-ON", Manufacturer_Name="LIGHT COUNTRY", Datasheet Link=https://www.tme.eu/Document/6c0299ce3235dd46f456febe8a77357f/slide_switch_5M.PDF, Geometry.Height=12.93mm, Manufacturer_Part_Number=5MS1S102AM2QE
X2: "MHz Crystal, 25 MHz, 5 x 3.2 mm, +/-10 ppm tolerance, +/-30 ppm stability, 18 pF, -40~85C, SMD", Manufacturer_Name=RALTRON, Datasheet Link=https://raltron.com/webproducts/specs/CRYSTAL/H130B-25.000-18-F-1030-EXT-TR.pdf, Geometry.Height=0.9mm, Manufacturer_Part_Number=H130B-25.000-18-F-1030-EXT-TR

## Free pads (board coordinates)
  round 6 hole 3.2 mask+0: 1(3.5,53.5) 1(45.466,3.556) 1(45.5,53.5) 3(3.5,3.5)

## Via types
v1: diameter 0.6, hole 0.3, Top Layer to Bottom Layer, 164 vias
v2: diameter 1.1, hole 0.5, Top Layer to Bottom Layer, 9 vias
v3: diameter 0.7, hole 0.3, Top Layer to Bottom Layer, 9 vias
v4: diameter 0.9, hole 0.4, Top Layer to Bottom Layer, 3 vias
v5: diameter 1.3, hole 0.7, Top Layer to Bottom Layer, 1 vias
v6: diameter 1.5, hole 0.7, Top Layer to Bottom Layer, 1 vias
v7: diameter 1.6, hole 0.8, Top Layer to Bottom Layer, 1 vias

## Nets (pads, with @x,y where several pads share a name; then routed paths per layer and width w, separated by ;. In a path a pad name is that pad's centre, name@x,y a point inside that pad or via, vN(x,y) a via of type N, cw(c..) or ccw(c..) an arc to the next point about the centre after c; other vN are vias at no path point)
8T_CLK_N: R7.2 U2.4 U3.17 | length 19.6
  Top Layer w0.204: U2.4 26.752,13.802 27.438,14.488 R7.2
  Top Layer w0.25: U2.4 22.012,13.802 cw(c22.012,14.863) 20.951,14.863 cw(c21.844,14.863) 21.844,15.756 24.909,15.756 ccw(c24.908,18.362) 26.752,16.519 27.991,17.759 ccw(c26.191,19.558) 28.736,19.558 U3.17
8T_CLK_P: R8.2 U2.3 U3.16 | length 20.3
  Top Layer w0.204: U2.3 26.98,13.152 27.324,12.808 R8.2
  Top Layer w0.25: U2.3 22.162,13.152 cw(c22.162,14.863) 20.451,14.863 cw(c21.844,14.863) 21.844,16.256 24.909,16.256 ccw(c24.909,18.362) 26.398,16.873 27.637,18.112 ccw(c26.191,19.558) 28.236,19.558 U3.16
8T_OUT_1: C31.2 J3.1 | length 22.2
  Top Layer w0.85: C31.2@34.561,24.003 37.973,24.003 ccw(c37.973,26.543) 40.513,26.543 40.513,32.556 cw(c42.819,32.556) 42.819,34.861 J3.1 J3.1@48.006,34.861
8T_OUT_2: C24.2 J2.1 | length 18.4
  Top Layer w0.85: C24.2@34.93,21.206 38.354,21.206 cw(c38.354,18.666) 40.894,18.666 40.894,16.256 ccw(c43.434,16.256) 43.434,13.716 J2.1 J2.1@48.006,13.716
+3V3: C2.2 C6.2 C7.1 C8.1 C9.1 C10.1 C11.1 C12.2 C13.2 C14.2 C15.2 C16.2 C17.2 C18.2 C19.2 C20.1 C21.1 C22.1 C32.1 C33.1 C35.2 C37.2 C38.2 D2.2 R10.2 R11.2 R12.2 R13.2 R14.1 R15.1 R16.2 U1.9 U1.10 U2.8 U3.1 U3.2 U3.10 U3.13 U3.15 U3.21 U3.30 U3.32 U3.36 U3.39 U4.1 U4.2 U4.3 U4.6
  other v1: 32.054,26.778 24.638,27.94 30.673,27.941 26.67,29.083
  other v2: 23.876,25.781 20.574,29.337 34.925,36.322 19.05,37.084 37.211,40.894
  other v3: 17.526,10.795 17.653,15.494 31.75,54.864
  other v4: 27.178,19.431 31.242,19.685 17.907,20.828
  other v7: 40.894,48.641
+5V: C1.2 Q1.3 R1.2 U1.1 U1.2 U1.3 U1.6
  other v2: 40.894,44.45 34.417,47.498
ADC_CLK_N: C5.2 J1.1 | length 13
  Top Layer w0.85: C5.2@28.367,8.382 32.639,8.382 cw(c32.639,5.842) 35.179,5.842 J1.1 J1.1@35.179,1.143
ADC_CLK_P: C4.2 J4.1 | length 14.1
  Top Layer w0.85: J4.1@13.716,1.016 J4.1 13.716,5.842 cw(c16.256,5.842) 16.256,8.382 C4.2@21.59,8.382
Debug: R17.1 U3.9 | length 9
  Top Layer w0.254: R17.1@16.129,22.009 25.109,22.009 U3.9
GND: C1.1 C2.1 C3.1 C6.1 C7.2 C8.2 C9.2 C10.2 C11.2 C12.1 C13.1 C14.1 C15.1 C16.1 C17.1 C18.1 C19.1 C20.2 C21.2 C22.2 C25.1 C27.1 C28.1 C29.1 C32.2 C33.2 C34.2 C35.1 C36.1 C37.1 C38.1 C40.1 C41.1 C42.2 D1.2 D3.2 D4.2 D5.2 D6.2 D7.2 D8.2 D9.2 D10.2 D11.2 D12.1 J1.2 J1.3 J1.4 J1.5 J2.2 J2.3 J2.4 J2.5 J3.2 J3.3 J3.4 J3.5 J4.2 J4.3 J4.4 J4.5 MH1.1 MH2.1 MH3.1 MH4.1 P1.1 R2.1 R3.1 R4.1 R5.1 R6.1 R18.1 R19.1 R20.1 R21.1 U1.8 U1.11 U2.5 U3.14 U3.41 U4.8 U4.11 | length 3.2
  Top Layer w0.254: U3.14 27.238,20.888 27.238,23.013 U3.41
  other v1: 14.95,0.967 41.771,1.36 6.858,1.397 36.322,1.651 12.476,1.766 24.892,2.667 14.956,3.567 36.449,3.556 34.036,3.81 12.476,4.366 22.733,5.588 26.289,5.588 33.909,5.588 30.925,5.715 18.161,5.842 7.372,5.95 15.001,6.166 36.369,6.429 12.647,6.961 17.411,7.142 20.011,7.142 25.073,7.142 27.486,7.142 29.645,7.142 32.245,7.142 22.607,7.288 3.562,7.347 38.771,7.36 41.771,7.36 44.771,7.36 47.782,7.45 35.433,8.382 13.722,8.86 9.912,9.252 15.875,9.525 18.923,9.525 33.274,9.525 21.462,9.622 28.939,9.622 31.115,9.652 41.148,9.652 26.797,9.779 23.241,9.906 4.705,11.03 34.55,11.03 26.702,11.233 44.48,12.53 46.639,12.53 42.368,12.633 20.965,12.781 37.338,13.081 32.787,13.8 40.281,14.183 5.086,14.205 19.172,14.798 46.512,14.816 43.337,14.943 23.438,15.001 1.149,15.475 27.008,15.575 14.368,15.71 30.861,16.383 42.134,16.653 39.654,16.706 20.382,16.751 10.361,16.752 4.959,16.872 23.684,16.884 37.114,17.102 25.781,17.319 1.149,18.269 29.32,18.349 42.084,19.253 39.483,19.301 17.771,19.36 4.959,19.539 24.511,19.812 45.847,19.812 36.97,19.965 1.149,20.809 40.816,21.523 11.563,21.825 4.959,22.079 42.418,22.098 38.385,22.443 1.149,23.349 40.083,23.412 21.336,23.495 43.972,24.214 4.964,24.601 11.771,25.36 38.571,25.394 41.606,25.519 35.56,25.654 46.385,25.738 1.149,25.889 17.272,26.035 19.431,26.162 14.478,26.416 5.213,26.905 39.273,27.897 41.753,28.115 1.149,28.302 43.688,28.702 13.087,29.572 4.97,29.662 39.116,29.718 9.912,29.953 22.479,30.226 15.367,30.353 41.753,30.715 33.909,30.734 1.149,30.969 9.652,31.877 5.213,32.239 17.397,32.709 42.055,33.298 1.149,33.509 26.416,33.528 44.635,33.621 12.827,33.655 46.766,33.739 39.497,34.036 34.504,34.122 20.283,34.559 3.689,35.287 41.275,35.687 46.639,36.025 43.434,36.068 8.771,37.36 41.402,38.1 30.607,38.735 42.799,40.132 4.271,40.36 10.271,40.36 13.271,40.36 16.271,40.36 19.271,40.36 22.271,40.36 25.271,40.36 28.454,41.256 46.99,41.656 2.771,43.36 44.771,43.36 2.771,49.36 5.771,49.36 8.771,49.36 44.771,49.36 31.629,52.178 28.271,52.36 40.271,52.36 36.703,52.959 8.007,55.353 29.851,55.734
  other v2: 27.94,23.867
  other v3: 26.416,22.201 29.591,22.201 26.797,25.4 29.464,25.4
  other v5: 37.41,38.019
  other v6: 37.592,46.609
GPIO0: D6.1 P2.4 U3.3 | length 19.7
  Top Layer w0.254: v3(23.622,23.876) 23.622,23.889 24.742,25.009 25.109,25.009 U3.3
  Bottom Layer w0.254: P2.4 10.186,20.701 D6.1 16.206,20.778 17.23,21.802 21.548,21.802 23.403,23.657 v3(23.622,23.876)
GPIO1: D7.1 P2.5 U3.7 | length 18.3
  Top Layer w0.254: P2.5 10.28,23.241 D7.1 10.287,23.134 10.763,23.134 11.164,22.733 23.99,22.733 24.268,23.011 U3.7
GPIO2: D8.1 P2.6 U3.24 | length 29.2
  Top Layer w0.2: U3.24 32.361,23.011 32.55,22.822 32.64,22.822 32.64,22.847 32.64,22.881 v1(32.629,22.881)
  Bottom Layer w0.254: P2.6 8.849,24.171 12.831,24.171 D8.1@12.949,24.052 ; D8.1 D8.1@12.949,24.052 ; v1(32.629,22.881) 32.64,22.881 32.64,22.847 32.64,22.822 32.444,22.822 32.332,22.934 32.279,22.881 25.887,22.881 24.13,24.638 23.114,24.638 22.86,24.384 13.281,24.384 D8.1@12.949,24.052
GPIO3: D9.1 P2.7 U3.28 | length 37.1
  Top Layer w0.254: U3.28 31.479,25.011 31.984,25.516 33.902,25.516 35.433,27.047 v3(35.433,29.718)
  Bottom Layer w0.254: P2.7 D9.1@9.906,28.321 ; D9.1 23.248,28.328 24.892,29.972 35.061,29.972 35.315,29.718 v3(35.433,29.718)
INTR: D10.1 P2.9 R14.2 U3.29 | length 38.1
  Top Layer w0.254: U3.29 31.333,25.511 31.795,25.973 33.637,25.973 34.753,27.089 34.753,31.312 v1(34.788,31.347)
  Bottom Layer w0.254: P2.9 8.763,34.925 13.97,34.925 17.091,31.804 R14.2@32.458,31.804 ; R14.2 34.242,31.893 v1(34.788,31.347)
MH1: MH1.2 pad.1@3.5,53.5 | length 5.5
  Bottom Layer w0.254: pad.1@3.5,53.5 4.372,52.628 8.548,52.628 MH1.2
MH2: MH2.2 pad.1@45.5,53.5 | length 5.3
  Bottom Layer w0.254: MH2.2 44.517,54.483 pad.1@45.5,53.5
MH3: MH3.2 pad.1@45.466,3.556 | length 9.7
  Bottom Layer w0.254: MH3.2 38.277,9.614 44.335,3.556 pad.1@45.466,3.556
MH4: MH4.2 pad.3 | length 7.6
  Bottom Layer w0.254: MH4.2 2.286,7.112 3.5,5.898 pad.3
NetC3_2: C3.2 R5.2 U1.7 | length 7.6
  Top Layer w0.254: U1.7 43.489,46.363 C3.2 43.608,46.339 R5.2
NetC4_1: C4.1 R9.1 U2.1 | length 5.4
  Top Layer w0.204: U2.1 U2.1@23.291,11.852 ; R9.1 24.253,8.396 ccw(c24.244,8.405) R9.1@24.257,8.405
  Top Layer w0.25: U2.1@23.291,11.852 cw(c23.291,10.845) 24.003,11.557 cw(c23.39,10.944) 24.257,10.944 R9.1@24.257,8.405
  Top Layer w0.85: C4.1@22.8,8.382 R9.1@24.003,8.382
NetC5_1: C5.1 R9.2 U2.2 | length 7.2
  Top Layer w0.204: U2.2 U2.2@23.583,12.502
  Top Layer w0.25: U2.2@23.583,12.502 cw(c23.583,10.492) 25.004,11.913 cw(c22.842,9.751) 25.9,9.751 R9.2@25.9,8.382
  Top Layer w0.85: R9.2@25.9,8.382 C5.1@27.317,8.382
NetC24_1: C24.1 U3.22 | length 3.2
  Top Layer w0.295: U3.22 31.093,22.011 cw(c31.093,21.441) 31.496,21.844 ccw(c33.037,23.385) 33.037,21.206 C24.1
NetC25_2: C25.2 U3.25 | length 4.9
  Top Layer w0.254: U3.25 32.991,23.511 33.139,23.363 33.279,23.363 33.501,23.363 v1(33.882,22.982)
  Bottom Layer w0.254: v1(33.882,22.982) 34.258,22.606 C25.2
NetC27_2: C27.2 U3.23 | length 5
  Top Layer w0.254: U3.23 31.642,22.511 31.928,22.225 32.019,22.134 32.677,22.134 32.704,22.16 32.715,22.149 v1(32.777,22.087)
  Bottom Layer w0.254: v1(32.777,22.087) 33.401,21.463 C27.2
NetC28_2: C28.2 U3.37 | length 10.8
  Top Layer w0.254: C28.2@22.978,35.569 22.978,35.468 23.209,35.237 23.31,35.237 25.527,33.02 25.527,28.968 27.236,27.259 U3.37
NetC29_2: C29.2 U3.38 | length 9
  Top Layer w0.254: C29.2 23.549,33.648 24.638,32.559 24.638,29.21 26.736,27.112 U3.38
NetC31_1: C31.1 U3.26 | length 2.8
  Top Layer w0.295: U3.26 33.339,24.011 ccw(c33.339,24.417) C31.1@33.626,24.13
NetC41_2: C41.2 R19.2 U4.7 | length 8.6
  Top Layer w0.254: R19.2@29.718,35.576 31.956,35.576 C41.2 ; C41.2@31.561,35.42 36.563,35.42 36.965,35.822 U4.7
NetC42_1: C42.1 Q1.4 X1.2
NetD1_1: D1.1 P1.2 X1.1
NetD2_1: D2.1 R4.2 | length 1.9
  Top Layer w0.254: D2.1@34.98,54.907 35.023,54.864 R4.2@36.846,54.864
NetD12_2: D12.2 R17.2 | length 2
  Top Layer w0.254: D12.2@14.188,19.849 R17.2@16.147,19.849
NetQ1_1: Q1.1 R1.1 R2.2
NetR3_2: R3.2 U1.5 | length 2.7
  Top Layer w0.254: R3.2 35.179,45.096 35.946,45.863 U1.5
NetR6_2: R6.2 R7.1 R8.1 | length 3.9
  Top Layer w0.254: R8.1 30.511,12.808 31.242,13.539 31.242,13.589 31.242,13.639 30.393,14.488 R7.1
NetR12_1: R12.1 R20.2 U3.20 | length 6.9
  Top Layer w0.254: U3.20 30.236,19.294 32.064,17.466 32.423,17.466 32.671,17.218 R12.1 32.663,17.137 32.663,15.248 R20.2
NetR13_1: R13.1 R21.2 U3.40 | length 15.6
  Top Layer w0.254: R21.2 13.47,34.949 15.486,34.949 R13.1@15.494,34.957 ; R13.1@15.614,34.932 16.503,34.932 24.799,26.636 U3.40
NetR16_1: R16.1 U3.35 | length 12.8
  Top Layer w0.254: R16.1@23.613,37.153 23.644,37.122 24.219,37.122 27.432,33.909 27.432,28.321 28.236,27.517 U3.35
NetR18_2: R18.2 U4.5 | length 3.1
  Top Layer w0.254: R18.2 36.316,40.005 36.465,39.856 U4.5
NetU3_33: U3.33 X2.1 | length 3.8
  Top Layer w0.254: U3.33 29.236,27.563 30.626,28.953 30.626,29.05 31.095,29.519 X2.1@31.199,29.519
NetU3_34: U3.34 X2.3 | length 7.6
  Top Layer w0.254: U3.34 28.736,27.779 27.889,28.626 27.889,32.109 28.403,32.623 28.426,32.623 29.126,33.323 X2.3@29.126,33.346
RESET: D11.1 P2.8 R15.2 U3.31 | length 31.5
  Top Layer w0.254: U3.31 31.021,26.636 31.379,26.994 31.839,27.454 32.893,28.508 v1(32.893,30.607)
  Bottom Layer w0.254: P2.8 cw(c7.493,30.861) 7.493,31.115 13.669,31.115 R15.2@19.177,31.115 ; R15.2 21.087,31.099 22.347,31.099 32.401,31.099 v1(32.893,30.607)
SCL: D4.1 P2.2 R11.1 U3.12 | length 21.9
  Top Layer w0.254: P2.2 8.351,16.733 cw(c10.282,14.802) 10.282,17.533 12.941,17.533 13.589,17.533 15.943,17.533 17.205,17.533 23.701,17.533 ccw(c23.701,20.068) 26.236,20.068 U3.12
SDA: D5.1 P2.3 R10.1 U3.11 | length 20.2
  Top Layer w0.254: P2.3 7.493,18.415 D5.1@10.263,18.415 ; D5.1@10.263,18.682 10.371,18.574 R10.1 ; R10.1@19.431,18.542 23.789,18.542 ccw(c23.789,20.489) 25.736,20.489 U3.11
TIMER: D3.1 P2.1 U2.6 U2.7 | length 11.3
  Top Layer w0.254: P2.1 cw(c7.374,12.946) 7.374,13.137 U2.6@18.503,13.137
VCO3: C34.1 C36.2 C40.2 U3.27 U4.9 U4.10 | length 1.5
  Top Layer w0.254: U3.27 32.131,24.511 32.162,24.542 v1(32.162,24.701)
  other v2: 37.211,34.544
pads on no net: U1.4 U3.4 U3.5 U3.6 U3.8 U3.18 U3.19 U4.4 X1.3 X2.2 X2.4

## Polygon pours and split planes (outlines as drawn)
GND on Bottom Layer "NONET_L06_P088" (solid, remove dead copper, shelved, pour order 88): 0.508,56.515 48.514,56.515 48.514,0.508 0.508,0.508
VCO3 on Bottom Layer "VCO3_L06_P028" (solid, pour order 28): 34.798,28.194 34.925,28.067 34.926,26.252 35.029,26.162 36.703,26.162 37.592,26.797 37.592,33.274 38.481,34.163 38.481,35.582 38.354,35.687 37.211,35.687 34.798,33.274
VCO3 on Bottom Layer "VCO3_L06_P071" (solid, pour order 71): 31.496,25.026 32.477,25.011 32.574,24.937 32.574,24.83 35.376,24.83 35.376,24.949 35.376,26.259 36.165,26.259 36.957,27.051 37.592,27.051 37.592,23.495 36.703,22.606 33.147,22.606 31.496,24.257
+3V3 on Bottom Layer "+3V3_L06_P034" (solid, pour order 34): 32.893,33.274 34.798,33.274 35.941,34.417 37.211,35.687 37.211,36.83 36.703,37.338 31.496,37.338 31.115,36.957 31.115,33.655 31.496,33.274 31.623,33.274
+3V3 on Bottom Layer "+3V3_L06_P011" (solid, pour order 11): 32.639,29.464 34.753,29.464 35.179,28.956 35.179,27.559 35.179,26.312 35.093,26.226 24.511,26.162 22.352,28.321 22.359,28.328 23.248,28.328 24.384,29.464 31.75,29.464 24.384,29.464 31.75,29.464
+3V3 on Bottom Layer "+3V3_L06_P003" (solid, pour order 3): 26.416,30.353 28.194,30.353 28.194,26.289 27.178,26.289 27.178,27.636 26.416,28.398 26.416,30.01
+3V3 on Bottom Layer "+3V3_L06_P031" (solid, pour order 31): 16.764,30.099 17.018,30.353 20.701,30.353 22.733,28.321 16.891,28.321 16.891,28.448 16.764,28.575
+3V3 on Bottom Layer "+3V3_L06_P029" (solid, pour order 29): 30.607,20.32 30.861,20.574 32.893,20.574 33.274,20.193 33.274,19.177 33.02,18.923 30.861,18.923 30.607,19.177
+3V3 on Bottom Layer "+3V3_L06_P030" (solid, pour order 30): 25.781,21.59 28.448,21.59 28.702,21.336 28.702,17.78 28.448,17.526 25.781,17.526 25.527,17.78 25.527,21.336
+3V3 on Bottom Layer "+3V3_L06_P032" (solid, pour order 32): 24.765,24.638 24.765,26.416 23.114,28.067 21.844,28.067 21.59,27.813 21.59,24.892 21.844,24.638 23.114,24.638
+5V on Bottom Layer "+5V_L06_P070" (solid, pour order 70): 33.274,47.879 33.909,48.514 35.179,48.514 35.687,48.006 35.687,45.974 36.322,45.339 41.402,45.339 41.783,44.958 41.783,43.942 41.402,43.561 34.29,43.561 33.274,44.577
GND on Top Layer "GND" (solid, remove dead copper, shelved, pour order 79): 48.514,56.515 48.514,0.508 0.508,0.508 0.508,56.515
+3V3 on Top Layer "+3V3_L01_P002" (solid, pour order 2): 25.109,22.009 25.147,21.971 25.654,21.971 25.654,21.463 24.765,20.574 20.828,20.574 20.32,20.066 17.259,20.066 17.019,20.333 17.021,21.418 17.308,21.671 17.78,21.717 25.024,22.098 25.111,22.011
+3V3 on Top Layer "+3V3_L01_P004" (solid, pour order 4): 27.432,28.326 27.432,31.369 25.864,31.426 25.527,31.09 25.4,26.636 28.238,26.636 28.238,27.519 27.836,27.921
+3V3 on Top Layer "+3V3_L01_P005" (solid, pour order 5): 34.88,28.946 34.753,26.371 33.893,25.511 33.131,25.511 30.75,25.511 29.337,26.035 29.236,27.556 30.626,28.946
+3V3 on Top Layer "+3V3_L01_P006" (solid, pour order 6): 25.4,26.67 25.4,25.019 25.39,25.009 24.742,25.009 24.742,24.996 23.622,23.876 22.126,23.876 21.971,24.073 21.971,27.305 22.987,28.321 24.672,26.636
VCO3 on Top Layer "VCO3_L01_P010" (solid, pour order 10): 35.941,34.798 35.941,33.782 36.025,33.401 38.47,33.401 38.608,33.909 38.608,36.957 36.957,36.957 36.965,36.949 36.965,35.822
+3V3 on Top Layer "+3V3_L01_P014" (solid, pour order 14): 36.957,36.957 36.957,35.83 36.965,35.822 35.941,34.798 34.417,34.798 34.163,35.052 34.163,36.703 34.417,36.957
+3V3 on Top Layer "+3V3_L01_P016" (solid, pour order 16): 37.211,38.989 38.735,38.989 39.37,39.624 39.37,44.577 38.862,45.085 36.83,45.085 36.195,44.45 36.195,40.513 36.703,40.005 36.957,40.005 37.211,39.751
+5V on Top Layer "+5V_L01_P017" (solid, pour order 17): 38.608,46.355 38.608,45.085 38.862,45.085 39.37,44.577 39.37,43.18 41.656,43.18 42.418,43.942 42.418,46.355
+3V3 on Top Layer "+3V3_L01_P021" (solid, pour order 21): 36.957,48.526 37.198,48.262 38.608,48.26 38.608,47.244 41.783,47.244 42.418,47.879 42.418,50.165 41.783,50.8 37.465,50.8 36.957,50.292 36.957,49.911
+3V3 on Top Layer "+3V3_L01_P025" (solid, pour order 25): 19.304,12.319 19.304,10.541 18.796,10.033 15.748,10.033 15.24,10.541 15.24,12.714 15.367,12.827 17.907,12.827 18.415,12.319
+3V3 on Top Layer "+3V3_L01_P035" (solid, pour order 35): 26.543,21.209 26.924,21.209 26.924,20.447 27.432,20.447 27.559,20.574 27.559,21.209 28.194,21.209 28.194,19.177 27.432,18.415 25.908,18.415 25.908,19.05 26.241,19.383 26.241,20.907
+3V3 on Top Layer "+3V3_L01_P037" (solid, pour order 37): 31.242,21.717 31.369,21.59 31.369,20.701 31.75,20.32 33.127,20.318 33.274,20.196 33.274,19.304 33.274,19.177 33.528,18.923 34.671,18.923 35.306,18.288 35.306,16.383 34.798,15.875 33.528,15.875 33.147,16.256 33.148,17.917 33.02,18.034 31.242,18.034 30.236,19.04 30.236,21.707 30.226,21.717 30.607,21.717
+3V3 on Top Layer "+3V3_L01_P075" (solid, pour order 75): 22.86,29.464 25.4,29.464 25.908,28.956 25.908,28.259 26.797,27.37 26.797,26.416 26.035,26.416 25.952,26.499 25.952,27.007 25.781,27.178 24.13,27.178 22.352,28.956 22.733,28.956 22.733,29.337
+3V3 on Top Layer "+3V3_L01_P077" (solid, pour order 77): 21.844,38.1 22.098,37.846 22.098,36.576 21.844,36.322 15.02,36.322 14.732,36.61 14.732,37.973 14.859,38.1
NetD1_1 on Top Layer "NETD1_1_L01_P023" (solid, pour order 23): 11.303,43.053 13.843,45.593 13.843,48.26 16.383,50.8 16.383,54.356 15.748,54.991 10.668,54.991 9.906,54.229 9.906,49.403 6.604,46.101 4.572,46.101 4.064,45.593 4.064,43.434 4.445,43.053
+5V on Top Layer "+5V_L01_P019" (solid, pour order 19): 36.56,50.308 36.195,50.673 28.067,50.673 27.559,50.165 27.559,46.99 27.94,46.609 36.449,46.609 36.592,46.752
NetQ1_1 on Top Layer "NETQ1_1_L01_P072" (solid, pour order 72): 33.401,46.101 33.782,45.72 33.782,43.307 33.401,42.926 30.861,42.926 30.607,42.672 27.94,42.672 27.559,43.053 27.559,45.72 27.94,46.101
TIMER on Top Layer "TIMER_L01_P000" (solid, remove dead copper, pour order 0): 19.304,12.319 19.304,13.335 16.637,13.335 16.446,13.144 17.272,12.319
+3V3 on Top Layer "+3V3_L01_P022" (solid, pour order 22): 33.956,55.325 33.782,55.499 31.369,55.499 31.162,55.292 31.162,54.436 31.369,54.229 33.782,54.229 33.956,54.403
NetC42_1 on Top Layer "NETC42_1_L01_P024" (solid, pour order 24): 17.526,54.991 20.701,54.991 21.336,54.356 21.336,51.308 23.368,49.276 26.416,49.276 27.305,48.387 27.305,43.18 26.289,42.164 19.558,42.164 18.542,43.18 18.542,44.45 17.907,45.085 15.748,45.085 14.986,45.847 14.986,48.514 16.891,50.419 16.891,54.356
+3V3 on Top Layer "+3V3_L01_P026" (solid, pour order 26): 15.24,16.129 15.24,15.113 15.494,14.859 18.161,14.859 18.415,15.113 18.415,16.002 18.161,16.256 15.367,16.256
GND on Int1 (GND) "GND_L02_P084" (solid, pour order 84): 4.904,0.508 44.172,0.508 48.514,4.85 48.514,52.142 44.141,56.515 4.859,56.515 4.859,56.448 0.508,52.097 0.508,52.096 0.508,4.904
GND on Int4 (GND) "GND_L05_P083" (solid, pour order 83): 4.904,0.508 44.172,0.508 48.514,4.85 48.514,52.142 44.141,56.515 4.859,56.515 4.859,56.447 0.508,52.096 0.508,4.904
+3V3 on Int3 (PWR) (split plane): 48.512,0.51 0.51,0.51 0.51,56.513 48.512,56.513
GND on Int2 (GND) (split plane): 48.512,0.51 0.51,0.51 0.51,56.513 48.512,56.513

## Other copper
Top Layer:
  pour cut-out: 33.316,20.706 ccw(c33.547,20.706) 33.547,20.474 34.94,20.474 ccw(c34.94,20.512) 34.978,20.512
  pour cut-out: 23.368,12.502 23.583,12.502 cw(c23.583,10.492) 25.004,11.913 25.075,11.843 cw(c23.279,10.046) 25.819,10.046 25.819,8.382 cw(c25.698,8.382) 25.784,8.297 25.144,7.657 24.894,7.657 ccw(c24.773,7.657) 24.859,7.742 24.219,8.382 ccw(c24.127,8.474) 24.257,8.474 24.257,10.777 ccw(c22.987,10.777) 23.885,11.675 23.587,11.973 cw(c24.116,12.502)
  pour cut-out: 32.742,25.179 ccw(c32.827,25.094) 32.706,25.094 32.706,23.315 cw(c30.166,23.315) 31.962,21.519 31.576,21.133 ccw(c33.227,22.784) 33.917,20.553 cw(c34.133,19.747) 34.242,20.574 cw(c34.386,20.274) 34.368,20.606 34.108,20.646 ccw(c33.916,20.838) 34.188,20.838 cw(c35.152,20.838) 34.47,21.52 34.688,21.738 ccw(c34.295,22.131) 34.851,22.131 34.851,23.333 ccw(c32.311,23.333) 34.107,25.129 34.031,25.205 cw(c33.969,25.267) 33.969,25.179
  pour cut-out: 28.367,9.113 21.59,9.113 21.59,7.651 28.367,7.651
  pour cut-out: 22.333,34.907 22.295,34.869 22.295,32.995 23.323,32.995 23.549,33.22 24.638,32.131 24.638,29.21 25.654,29.21 25.654,32.893 23.368,35.179 22.606,35.179
  pour cut-out: 34.326,43.11 34.326,44.266 34.842,44.266 35.614,45.038 35.614,46.402 33.443,46.402 33.591,46.253 33.591,43.116 34.319,43.116
  pour cut-out: 21.923,38.291 22.074,38.14 23.033,38.14 23.033,36.434 24.19,36.434 24.19,36.545 24.228,36.583 24.282,36.583 24.282,36.224 23.539,35.481 23.539,36.213 22.333,36.213 22.234,36.115 21.844,36.115 21.844,38.212
  pour cut-out: 15.494,21.59 16.849,21.59 17.021,21.418 17.019,21.417 17.019,20.195 16.673,19.849 15.229,19.849 15.229,20.139 15.276,20.186 15.276,21.377 15.281,21.377
  pour cut-out: 27.51,15.116 30.266,15.116 30.266,14.559 31.242,13.584 31.242,13.563 31.17,13.563 29.799,12.192 27.522,12.192 27.516,12.185 27.516,12.7 27.051,12.7 26.599,13.152 26.599,13.649 27.438,14.488 27.438,14.702 27.51,14.774
  pour cut-out: 22.333,34.907 22.333,34.727 22.295,34.689 23.251,34.689 23.251,34.743 23.289,34.782 23.164,34.907
  pour cut-out: 27.305,34.544 32.084,34.544 32.102,34.526 32.102,30.826 32.401,30.826 32.466,30.892 32.556,30.802 32.556,29.153 32.526,29.123 30.699,29.123 30.699,29.048 30.226,28.575 30.175,28.626 27.889,28.626 27.889,31.801 27.305,32.385
Int1 (GND):
  pour cut-out: 34.722,20.474 cw(c34.722,20.931) 34.266,20.931 34.266,21.693 cw(c34.544,21.693) 34.544,21.971 38.354,21.971 cw(c38.354,18.669) 41.656,18.669 41.656,16.225 ccw(c43.434,16.225) 43.434,14.447 48.291,14.447 cw(c48.291,14.097) 48.641,14.097 48.641,13.164 cw(c48.426,13.164) 48.426,12.949 43.439,12.949 cw(c43.439,16.256) 40.132,16.256 40.132,18.696 ccw(c38.354,18.696) 38.354,20.474
  pour cut-out: 34.036,24.278 cw(c34.523,24.278) 34.523,24.765 38.004,24.765 ccw(c38.004,26.543) 39.782,26.543 39.782,32.543 cw(c42.721,32.612) 40.784,34.824 cw(c43,32.35) 43.476,35.638 48.352,35.638 cw(c48.133,35.179) 48.641,35.179 48.641,34.601 cw(c48.195,34.601) 48.195,34.155 42.918,34.155 ccw(c42.918,32.512) 41.275,32.512 41.275,26.416 cw(c38.131,26.416) 38.131,23.272 34.267,23.272 cw(c34.267,23.503) 34.036,23.503
  pour cut-out: 27.842,7.882 ccw(c28.087,7.882) 28.087,7.637 32.653,7.637 cw(c32.653,5.842) 34.448,5.842 34.448,0.35 ccw(c34.544,0.35) 34.544,0.254 35.686,0.254 ccw(c35.686,0.528) 35.96,0.528 35.96,5.823 ccw(c32.639,5.823) 32.639,9.144 28.104,9.144 ccw(c28.104,8.882) 27.842,8.882
  pour cut-out: 14.341,0.508 ccw(c14.341,0.614) 14.447,0.614 14.447,5.842 cw(c16.256,5.842) 16.256,7.651 22.383,7.651 ccw(c22.383,7.874) 22.606,7.874 22.606,8.737 ccw(c22.228,8.737) 22.228,9.114 16.256,9.114 ccw(c16.229,9.117) 16.229,9.144 ccw(c16.229,5.869) 12.954,5.869 12.954,0.645 ccw(c13.091,0.645) 13.091,0.508
  pour cut-out: 23.84,9.115 22.228,9.114 22.222,7.649 24.591,7.651 24.594,8.807 23.834,8.807
  pour cut-out: 26.309,9.109 28.112,9.108 28.122,7.637 25.447,7.643 25.445,8.225 25.443,8.805 26.309,8.805

## Silkscreen, mask and mechanical layers (free items; w line width, h text height)
Top Overlay:
  text "ON" at 8.636,51.181 h1.52 r90
  text "OFF" at 30.988,50.546 h1.52 r90
  text "+VCC" at 3.248,47.571 h1.1
  text "Power" at 1.664,40.332 h1.1 r90
  text "1" at 15.694,38.046 h1
  text "0" at 13.154,37.792 h1.1
  text "GND" at 1.216,36.395 h1.1
  text "A0" at 10.487,36.268 h1.1
  text "Input" at 5.153,35.619 h1.1
  text "INT" at 2.486,32.966 h1.1
  text "RST" at 2.359,30.426 h1.1
  text "GP3" at 2.105,27.886 h1.1
  text "OUT1" at 44.269,27.505 h1.1
  text "3" at 14.695,27.173 h5
  text "GP2" at 2.232,25.219 h1.1
  text "GP1" at 2.486,22.806 h1.1
  text "OUT2" at 43.761,20.266 h1.1
  text "GP0" at 2.232,20.139 h1.1
  text "SDA" at 2.232,17.726 h1.1
  text "A1" at 30.426,17.345 h1.1
  text "1" at 35.506,16.583 h1
  text "SCL" at 2.232,15.059 h1.1
  text "0" at 35.505,14.54 h1.1
  text "TIMER" at 0.454,12.392 h1.1
  text "TDR 3.0" at 0.962,9.598 h1.1
  text "P. Budny" at 1.216,7.806 h1.1
  text "ADC_N" at 28.527,0.857 h1.1 r90
  text "ADC_P" at 21.207,0.708 h1.1 r90
Bottom Overlay:
  text "[+5V... 18V]" at 12.754,46.428 h1.1
  text "350ps / 0V-1V" at 48.514,37.592 h1.1 r90
  text "Pulse / Outputs" at 48.133,27.305 h1.1 r90
  text "240ps / 0V-1V" at 48.358,16.486 h1.1 r90
  text "25.03" at 7.166,8.455 h1.1
  text "Pos / 0-0.8V" at 16.637,2.159 h1
  text "Neg / 0-0.8V" at 38.1,2.032 h1
  text "Clocck outputs" at 27.813,1.016 h1
Mechanical 1:
  lines w0.254: 0,0 49,0 ; 0,0.023 0,57.023 49.022,57.023 49.022,0